# Altium PCB NewSpeedRadar_Board.PcbDoc (part 1 of 4)
Units mm, origin at the board's own origin, x right, y up, seen from the top; angles counter-clockwise.
Board outline 150 x 110 mm, 2 copper layers (Top Layer, Bottom Layer), stack 1.571 mm thick; 208 components, 164 nets, 788 pads, 782 vias.
Unrouted connection lines stored in the file: 231.
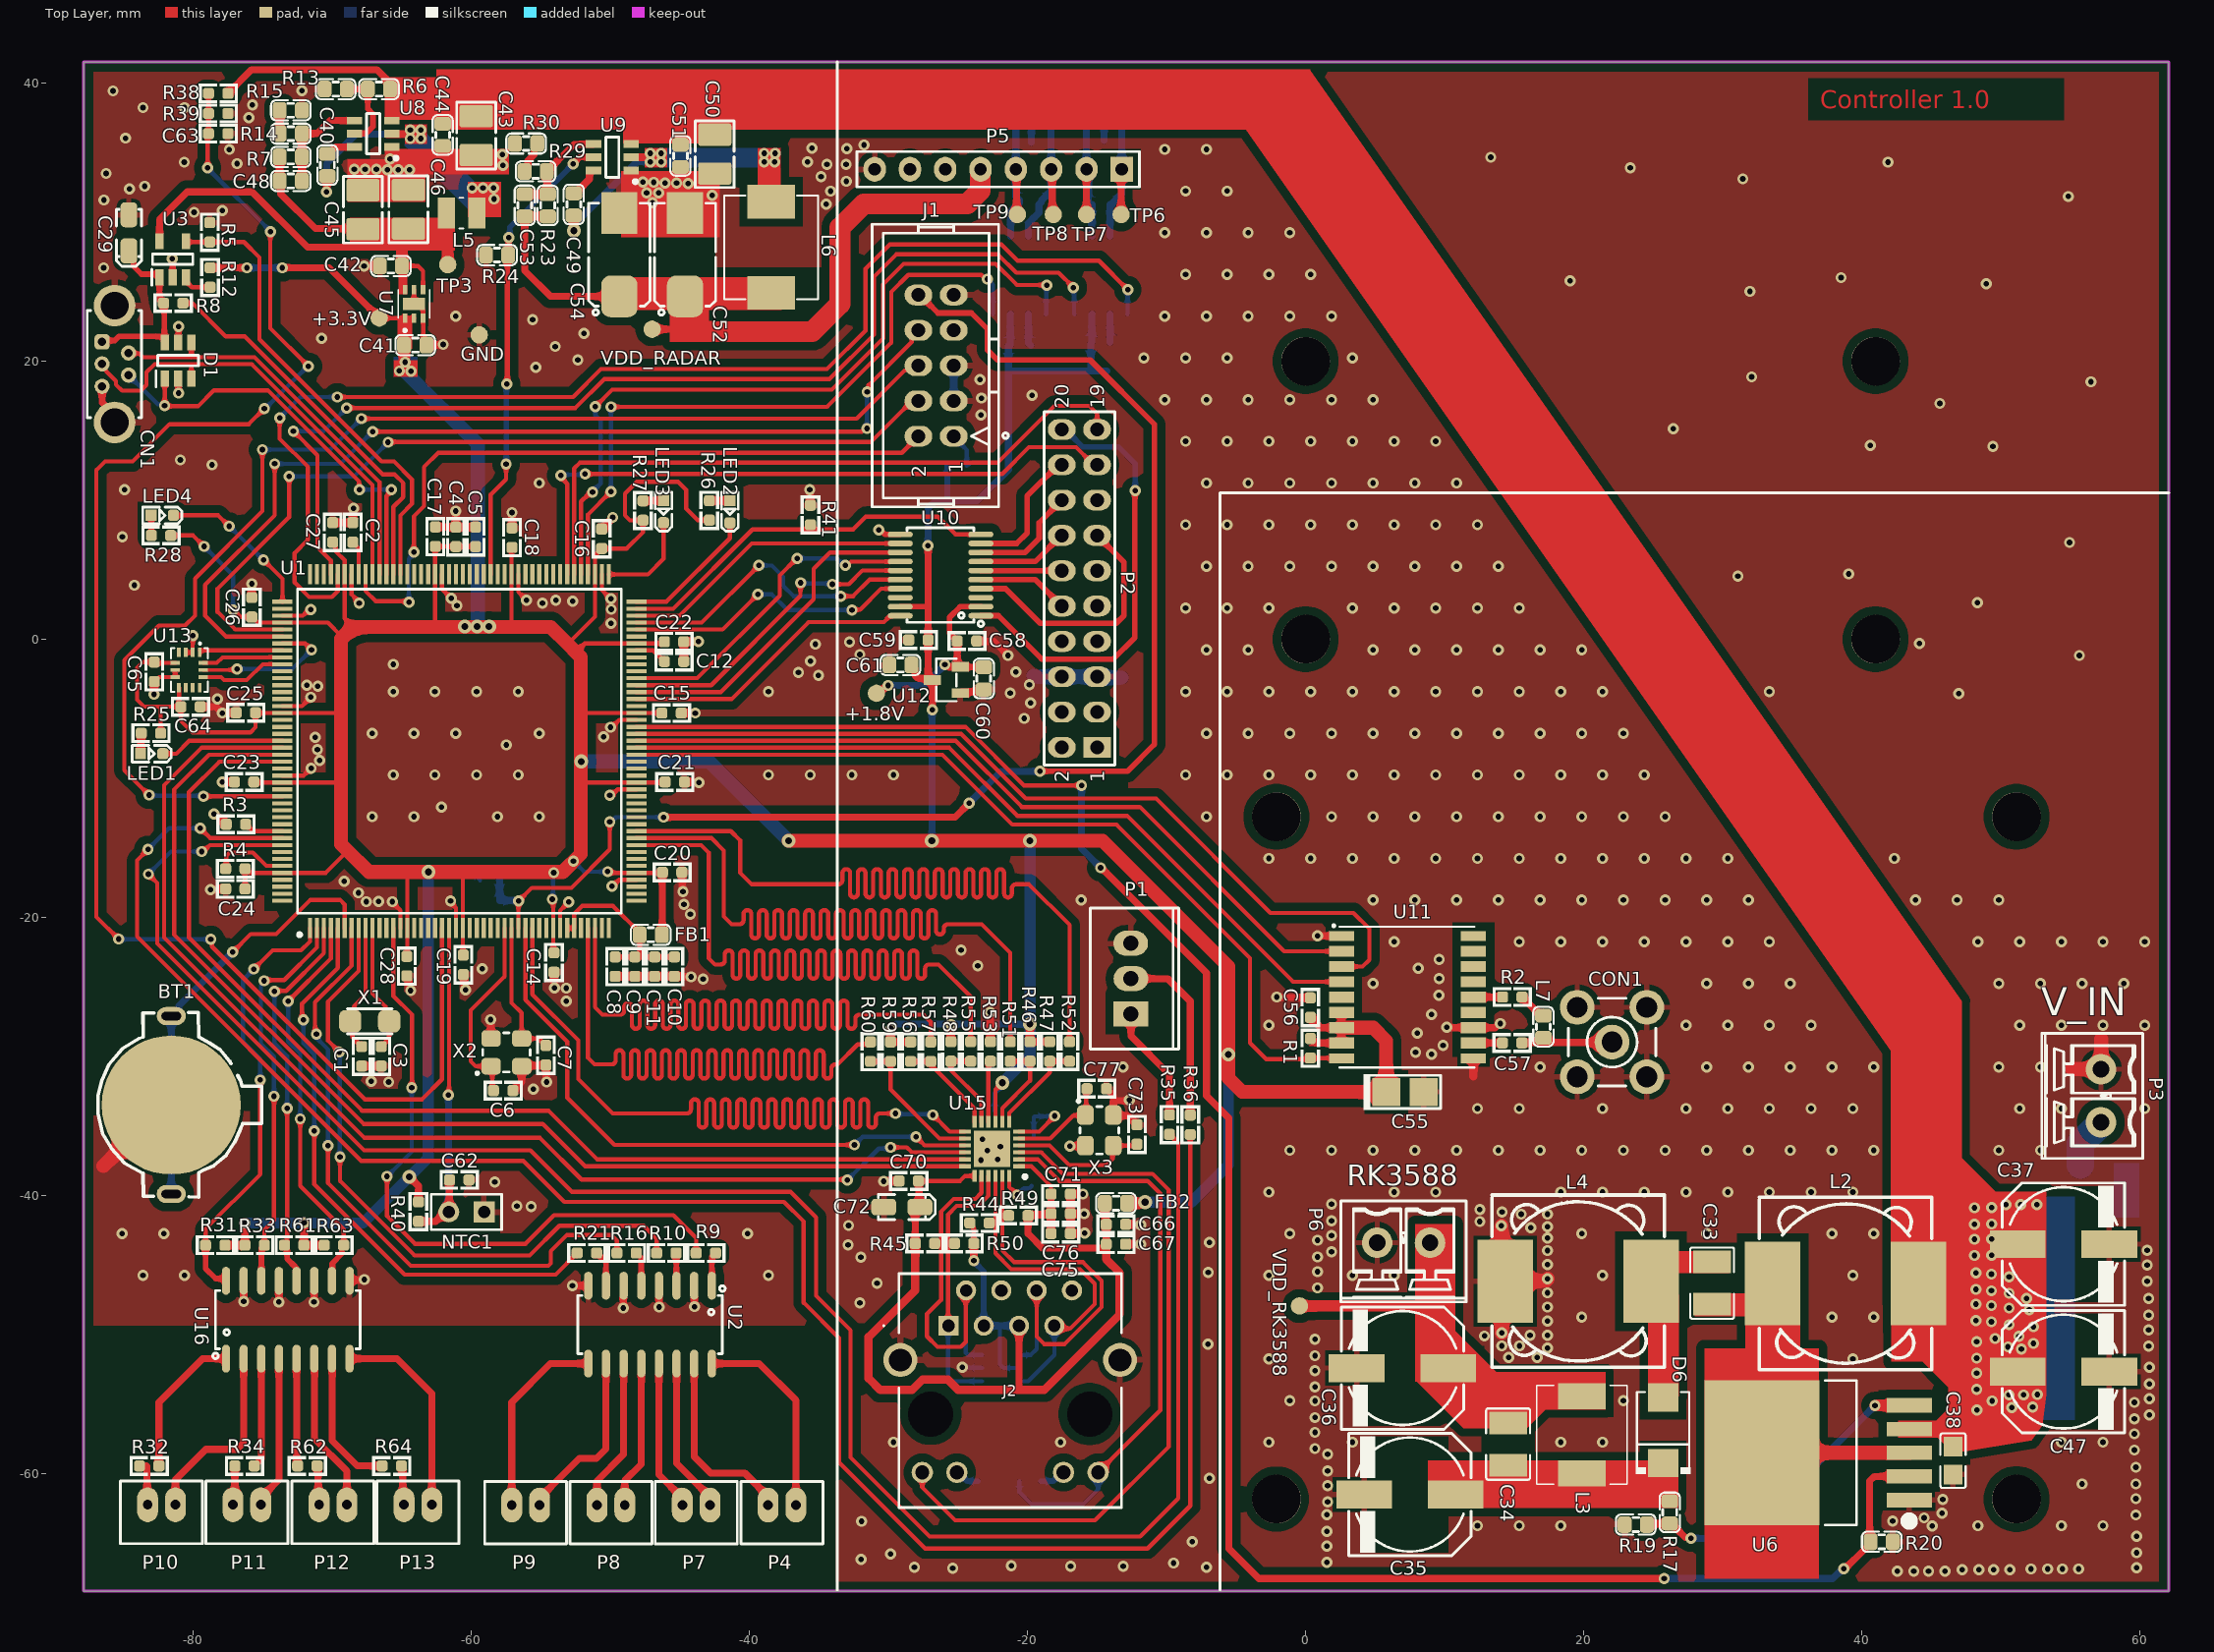
[diagram p0: Top Layer view]
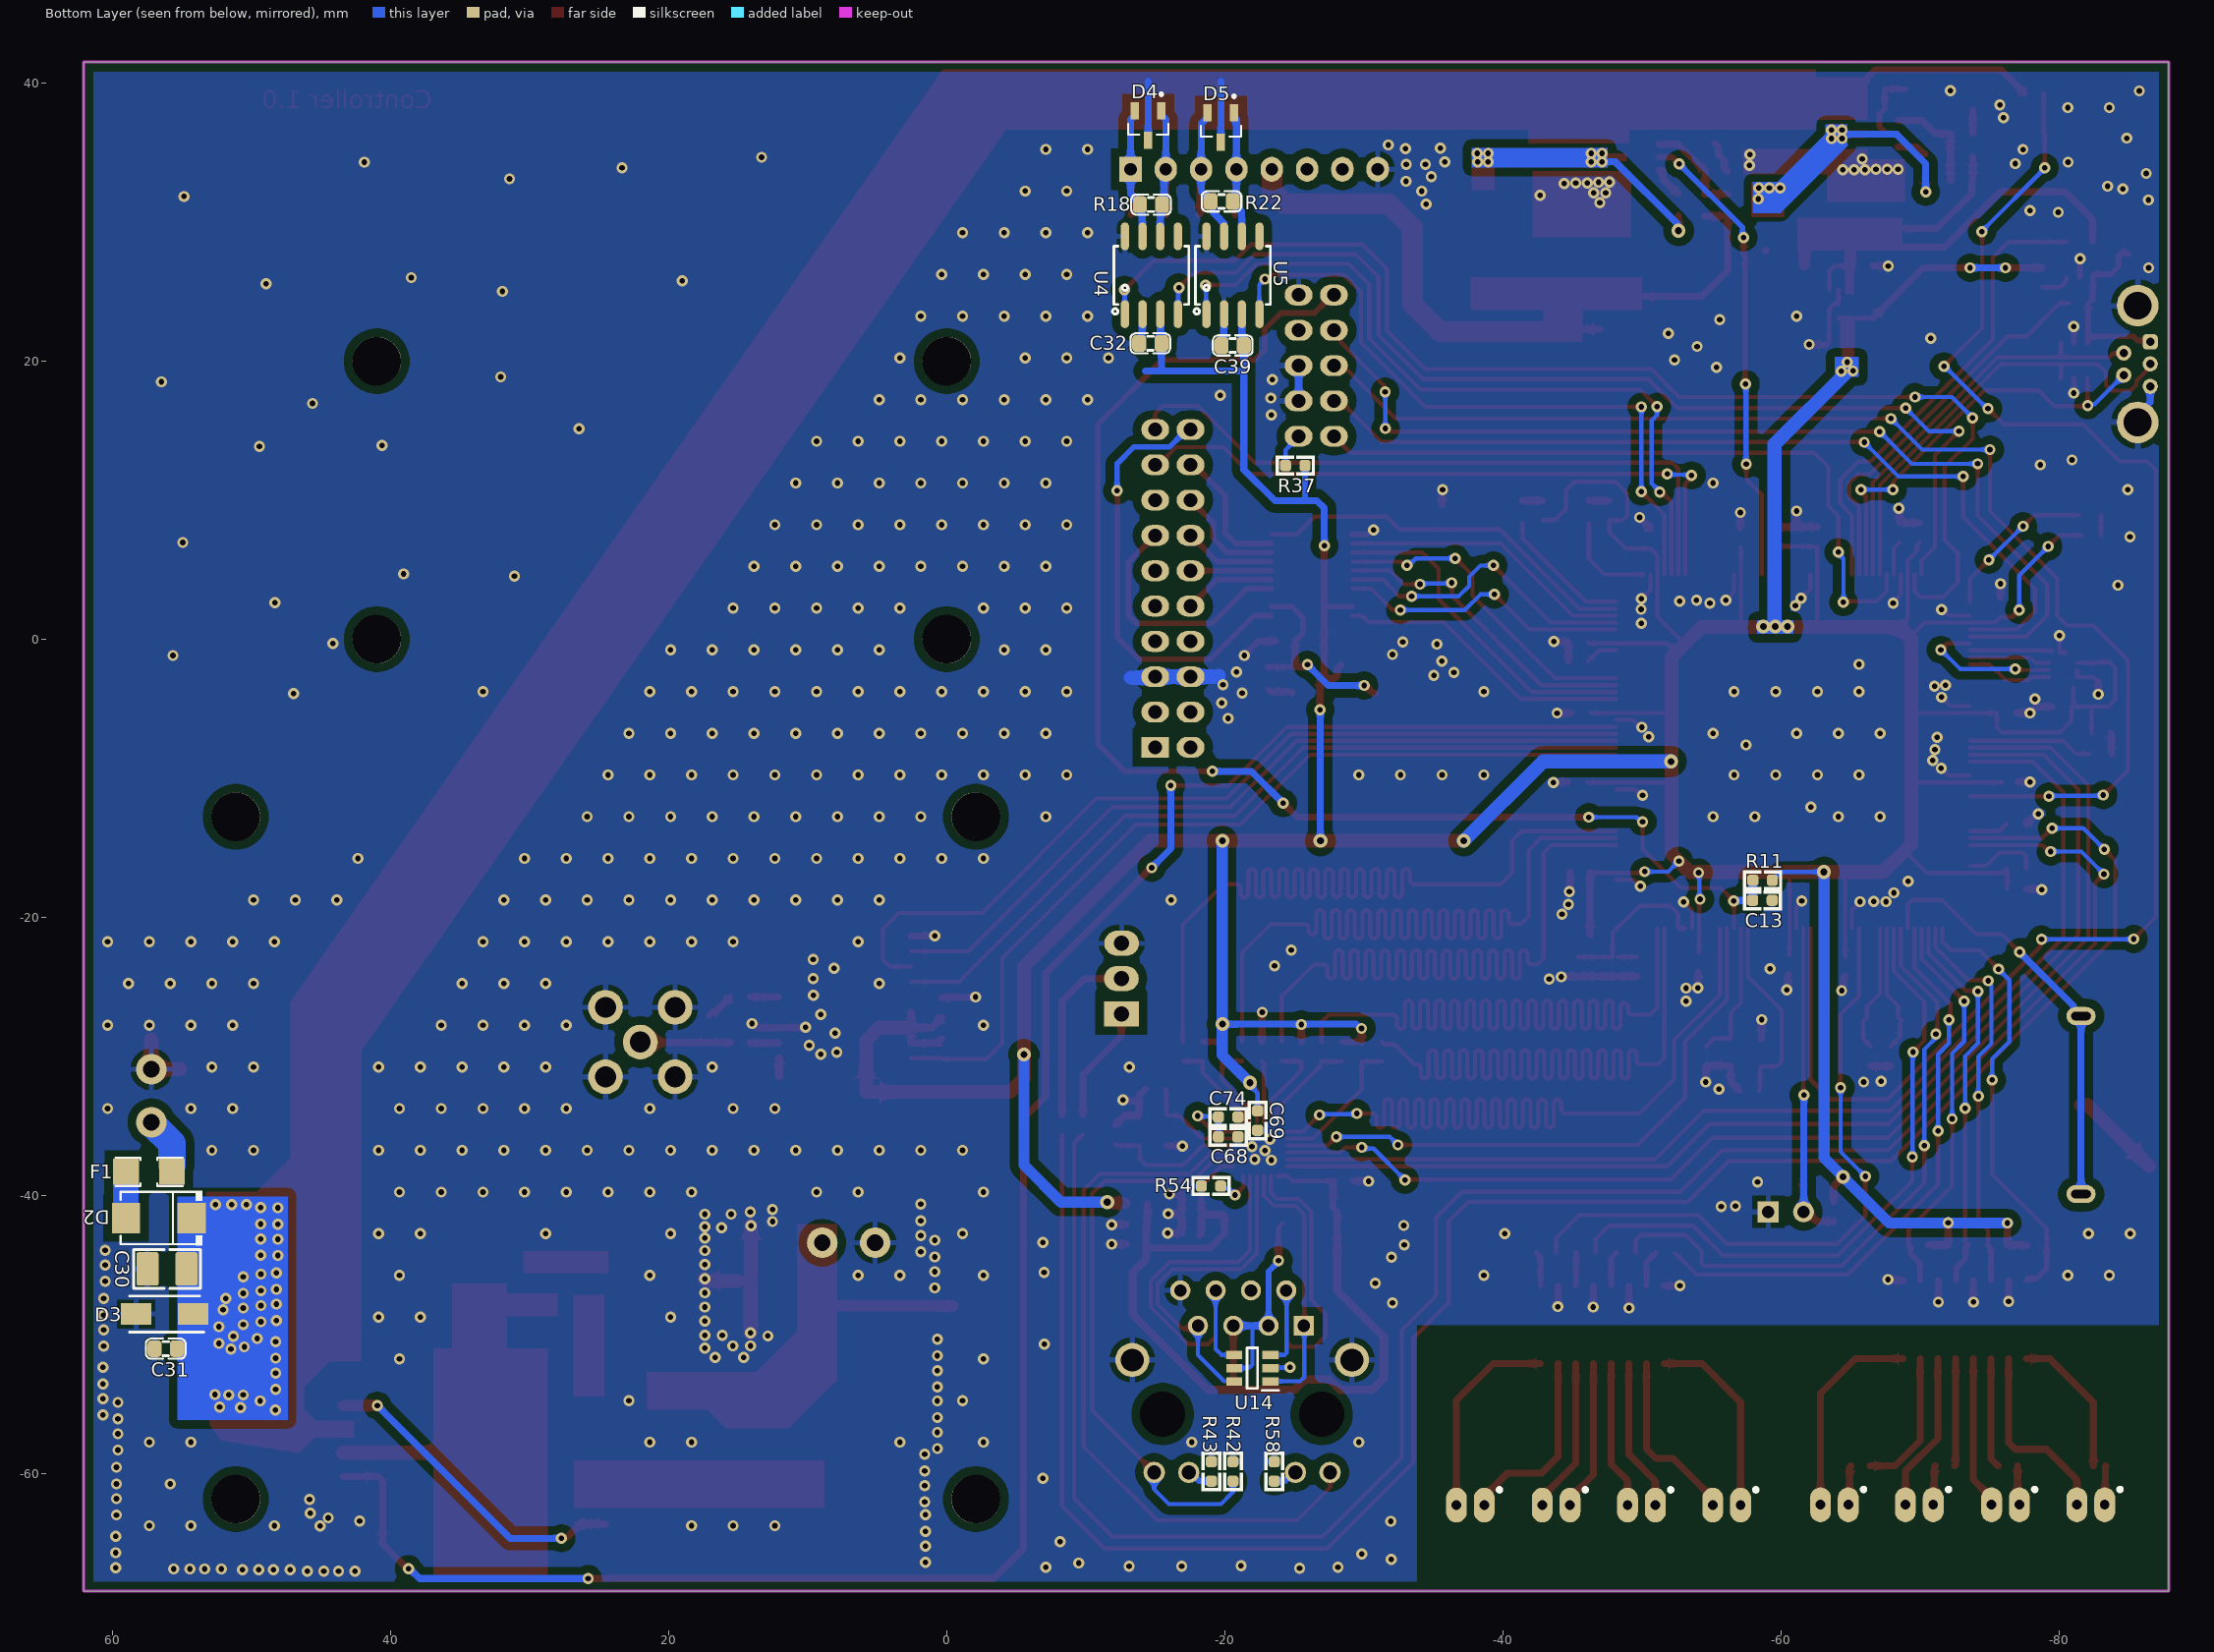
[diagram p1: Bottom Layer view, seen from below]
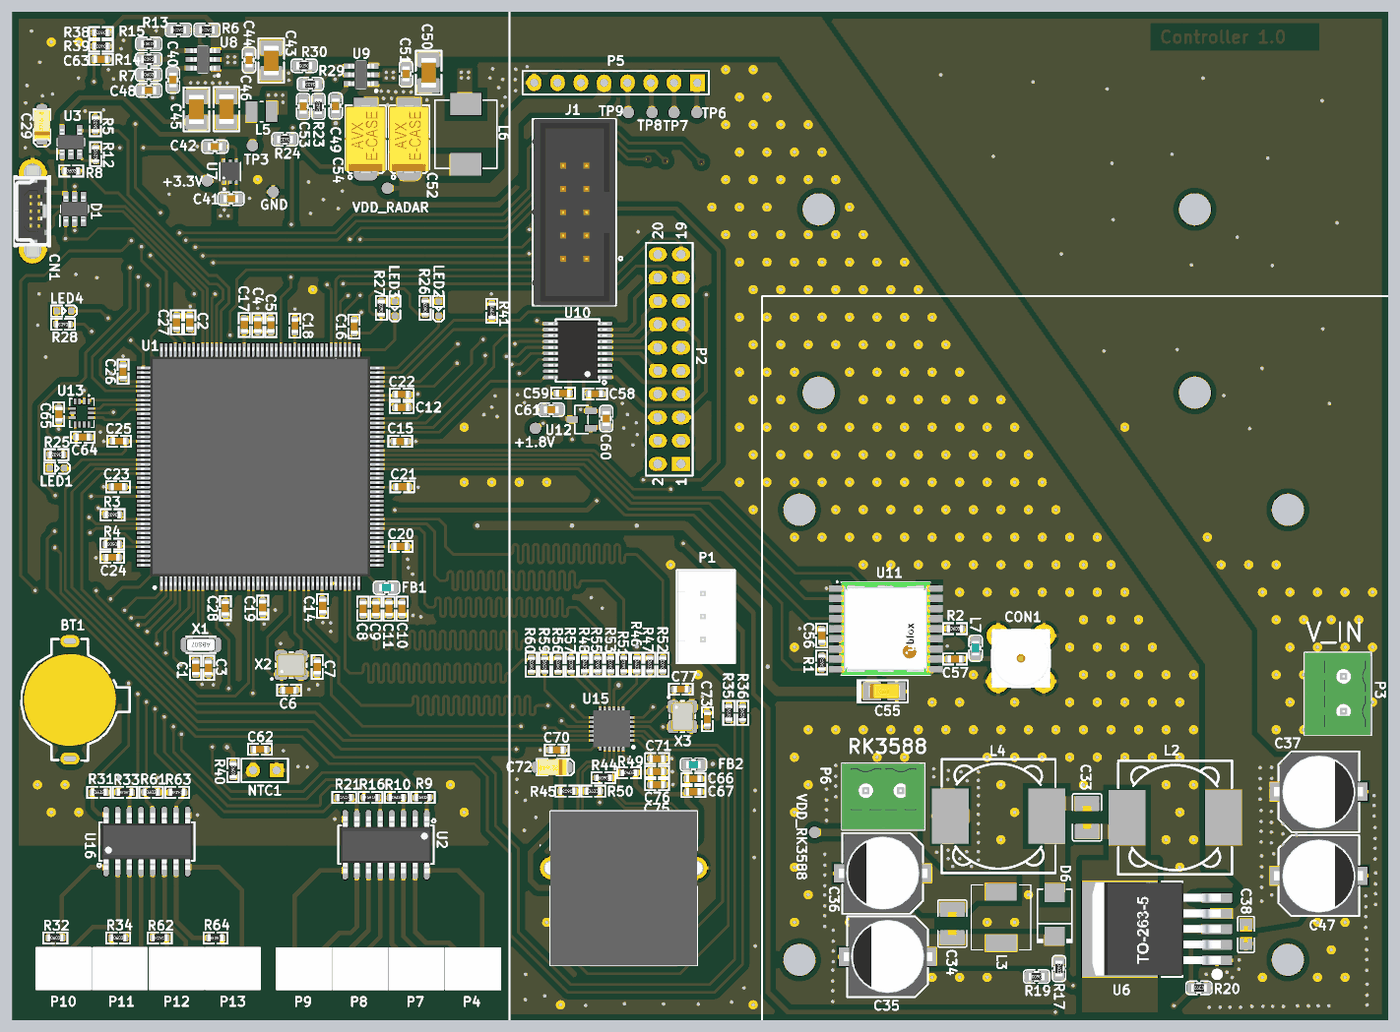
[diagram p4: 3D render of the assembled board from above, using the file's embedded part models]
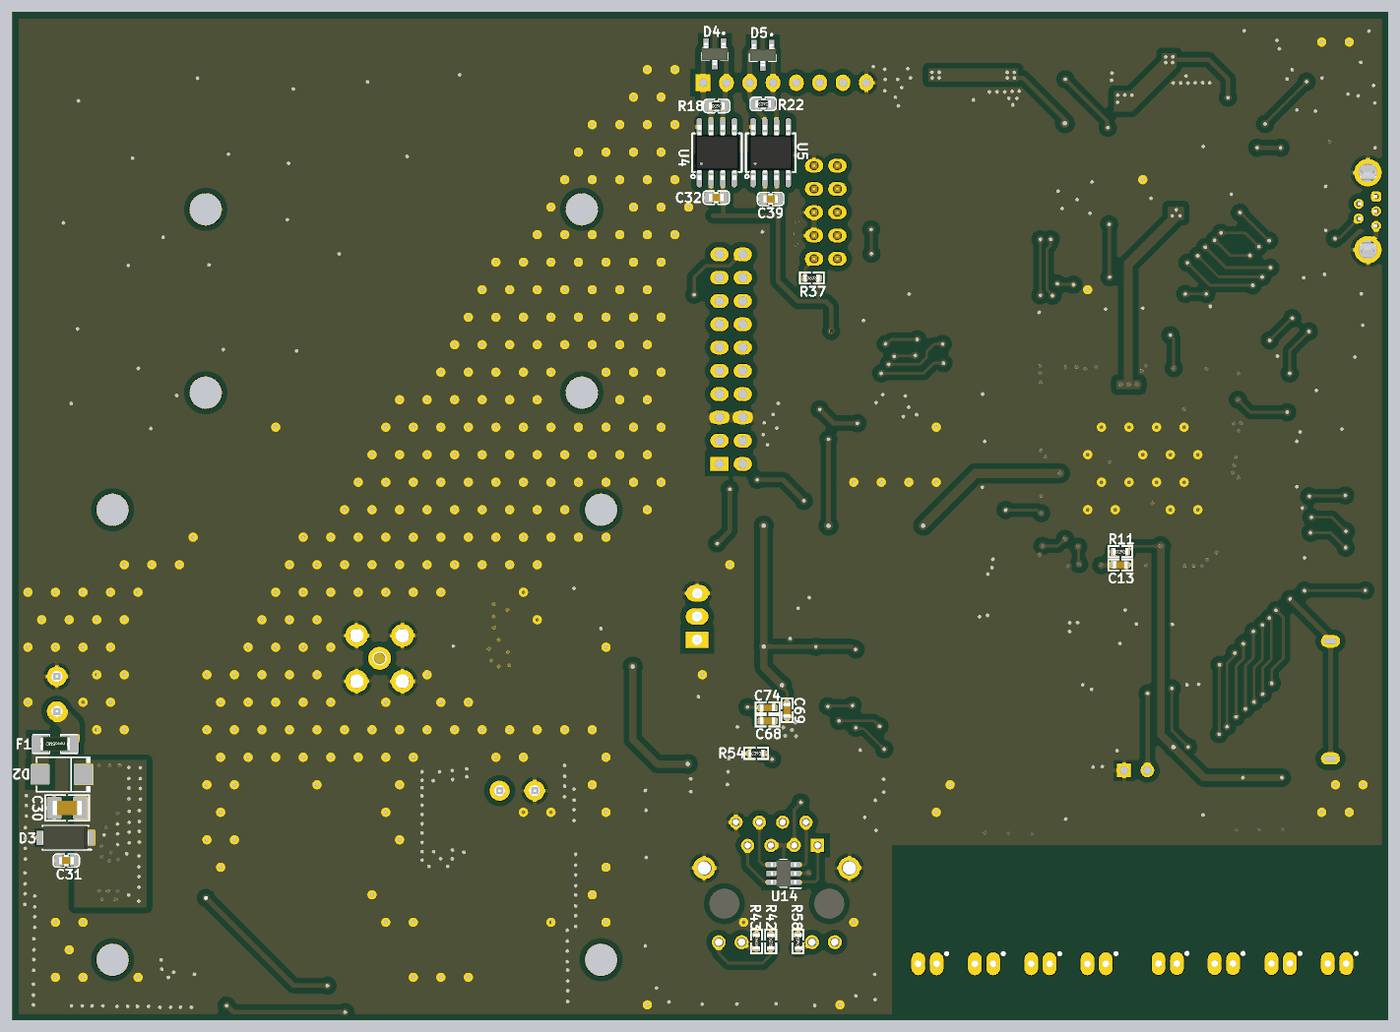
[diagram p5: 3D render of the assembled board from below, using the file's embedded part models]

## Layer stack, top to bottom
Top Solder: solder mask 0.0102, Solder Resist, Dk 3.5
Top Layer: signal copper 0.0356
Dielectric 1: dielectric 1.5, FR-4, Dk 4.8
Bottom Layer: signal copper 0.0356
Bottom Solder: solder mask 0.0102, Solder Resist, Dk 3.5

## Board outline
-87.906,-68.475 -87.906,41.525 62.094,41.525 62.094,-68.475

## Design rules (kind name [scope] priority, off if disabled: settings)
AcuteAngle [All] p1 off: minimum=4.00000000000000E+0001 checktracksonly=TRUE
BoardOutlineClearance [All] p1: gap=0.2 ignorepadtopadclearanceinfootprint=FALSE
Clearance Poly_Clearance [All vs InPolygon] p1: gap=0.6 ignorepadtopadclearanceinfootprint=TRUE
Clearance [All] p2: gap=0.2 ignorepadtopadclearanceinfootprint=TRUE
DiffPairsRouting [IsDifferentialPair] p1: maxlimit=0.2 minlimit=0.2 mostfreqgap=0.2 toplayer_minwidth=0.3 toplayer_maxwidth=0.3 toplayer_prefwidth=0.3 bottomlayer_minwidth=0.3 bottomlayer_maxwidth=0.3 bottomlayer_prefwidth=0.3 impedanceprofiledriven=TRUE impedanceprofileid={2EFD21D1-4BE4-4069-921C-6C90A30C849C} impedanceprofilevalue=100.000000 maxuncoupledlength=12.7
HoleSize [All] p1: absolutevalues=TRUE maxlimit=10 minlimit=0.4 maxpercent=80.000 minpercent=20.000
HoleToHoleClearance [All] p1: gap=0.3 allowstackedmicrovias=TRUE
MatchedLengths [InNetClass('ETHERNET')] p1: tolerance=10 checknetsindiffpair=FALSE checkdiffpairvsdiffpair=TRUE checkxsignals=TRUE checkothers=TRUE
MatchedLengths "Schematic Matched Net Lengths_3" [InNet('TD_N')] p2: tolerance=2.54 checknetsindiffpair=TRUE checkdiffpairvsdiffpair=FALSE checkxsignals=FALSE checkothers=FALSE
MatchedLengths "Schematic Matched Net Lengths_2" [InNet('RD_N')] p3: tolerance=2.54 checknetsindiffpair=TRUE checkdiffpairvsdiffpair=FALSE checkxsignals=FALSE checkothers=FALSE
MatchedLengths "Schematic Matched Net Lengths_1" [InNet('TD_P')] p4: tolerance=2.54 checknetsindiffpair=TRUE checkdiffpairvsdiffpair=FALSE checkxsignals=FALSE checkothers=FALSE
MatchedLengths "Schematic Matched Net Lengths" [InNet('RD_P')] p5: tolerance=2.54 checknetsindiffpair=TRUE checkdiffpairvsdiffpair=FALSE checkxsignals=FALSE checkothers=FALSE
MinimumAnnularRing [All] p1: minimumring=0.15
MinimumSolderMaskSliver [All] p1: minsoldermaskwidth=0.01
PolygonConnect [All] p1: thpad.connectstyle=Relief thpad.reliefconductorwidth=0.4 thpad.reliefentries=4 thpad.polygonreliefangle="90 Angle" thpad.airgapwidth=0.4 smdpad.connectstyle=Relief smdpad.reliefconductorwidth=0.4 smdpad.reliefentries=4 smdpad.polygonreliefangle="90 Angle" smdpad.airgapwidth=0.254 via.connectstyle=Direct via.reliefconductorwidth=0.4 via.reliefentries=4 via.polygonreliefangle="90 Angle" via.airgapwidth=0.254
RoutingVias [All] p1: holewidth=0.4 width=0.7 viastyle="Through Hole" minholewidth=0.4 minwidth=0.7 maxholewidth=3 maxwidth=6
SilkToSolderMaskClearance [IsPad] p1 off: minsilkscreentomaskgap=0.01 clearancetoexposedcopper=TRUE
SolderMaskExpansion [All] p1: expansion=0.102 istentingtop=FALSE
Width [All] p1: maxlimit=2 minlimit=0.28 preferedwidth=0.5
25 further rules are at their usual default settings.

## Classes and differential pairs
net class ETHERNET: ETH_MDC ETH_MDIO RMII_CRS_DV RMII_REF_CLK RMII_RXD0 RMII_RXD1 RMII_TXD0 RMII_TXD1
component class Ethernet: C66 C67 C68 C69 C70 C71 C72 C73 C74 C75 C76 C77 FB2 J2 R42 R43 R44 R45 R46 R47 R48 R49 R50 R51 R52 R53 R54 R55 R56 R57 R58 R59 R60 U14 U15 X3
component class USB_OTG_FS: C29 CN1 D1 R5 R12 U3
component class STM32H743IIT6: BT1 C1 C2 C3 C4 C5 C6 C7 C8 C9 C10 C11 C12 C13 C14 C15 C16 C17 C18 C19 C20 C21 C22 C23 C24 C25 C26 C27 C28 C55 C56 C57 C58 C59 C62 C64 C65 CON1 FB1 GND J1 L7 LED1 LED2 LED3 LED4 NTC1 P1 P2 P4 P7 P8 P9 P10 P11 P12 P13 R1 R2 R3 R4 R8 R9 R10 R11 R16 R21 R25 R26 R27 R28 R31 R32 R33 R34 R35 R36 R37 R40 R41 R61 R62 R63 R64 U1 U2 U10 U11 U13 U16 X1 X2
component class Power_CAN_IO_GPS: +1.8V +3.3V C30 C31 C32 C33 C34 C35 C36 C37 C38 C39 C40 C41 C42 C43 C44 C45 C46 C47 C48 C49 C50 C51 C52 C53 C54 C60 C61 C63 D2 D3 D4 D5 D6 F1 L2 L3 L4 L5 L6 P3 P5 P6 R6 R7 R13 R14 R15 R17 R18 R19 R20 R22 R23 R24 R29 R30 R38 R39 TP3 TP6 TP7 TP8 TP9 U4 U5 U6 U7 U8 U9 U12 VDD_RADAR VDD_RK3588
differential pair TD: +TD_P -TD_N
differential pair RD: +RD_P -RD_N
differential pair USB_FS1_D: +USB_FS1_D_P -USB_FS1_D_N

## Components (designator, comment, footprint, x,y, rotation, side; value= is the part's Value field where it differs from the comment)
+1.8V "TEST POINT" TEST_POINT -30.874,-3.889 r0 top
+3.3V "TEST POINT" TEST_POINT -66.637,23.111 r90 top
BT1 "MY-1220-06X" BAT-TH_MY-1220-01 -81.598,-33.505 r90 top value=BAT3volt
C1 "1.5pF" C0603 -67.907,-30 r270 top value=100nF
C2 "2.2uF" C0603 -68.542,7.682 r90 top value=10nF
C3 "1.5pF" C0603 -66.485,-30 r270 top value=100nF
C4 "1uF" C0603 -61.126,7.363 r270 top value=10nF
C5 "100nF" C0603 -59.703,7.363 r270 top value=10nF
C6 "3.9pF" C0603 -57.722,-32.464 r0 top
C7 "3.9pF" C0603 -54.649,-29.924 r270 top
C8 "1uF" C0603 -49.67,-23.548 r90 top value=10nF
C9 "100nF" C0603 -48.248,-23.548 r90 top value=10nF
C10 "1uF" C0603 -45.403,-23.548 r90 top value=10nF
C11 "100nF" C0603 -46.825,-23.548 r90 top value=10nF
C12 "2.2uF" C0603 -45.428,-1.603 r180 top value=10nF
C13 "100nF" C0603 -58.679,-18.78 r0 bottom value=100pF
C14 "100nF" C0603 -54.064,-23.255 r270 top
C15 "100nF" C0603 -45.606,-5.311 r0 top
C16 "100nF" C0603 -50.635,7.225 r90 top
C17 "100nF" C0603 -62.599,7.378 r90 top
C18 "100nF" C0603 -57.087,7.301 r90 top
C19 "100nF" C0603 -60.592,-23.421 r270 top
C20 "100nF" C0603 -45.567,-16.767 r0 top
C21 "100nF" C0603 -45.378,-10.264 r0 top
C22 "100nF" C0603 -45.428,-0.18 r0 top
C23 "100nF" C0603 -76.354,-10.264 r180 top
C24 "100nF" C0603 -76.989,-17.96 r180 top
C25 "100nF" C0603 -76.239,-5.286 r180 top
C26 "100nF" C0603 -75.807,2.298 r90 top
C27 "100nF" C0603 -69.99,7.682 r90 top
C28 "100nF" C0603 -64.656,-23.512 r270 top
C29 "10uF/10V TAN A" C_TN_3216 -84.648,29.233 r90 top value=10uF
C30 "22uF" C1206E 56.094,-45.291 r180 bottom
C31 "10nF/50V" C0603E 56.183,-51.031 r180 bottom
C32 "100nF" C0603E -14.644,21.283 r180 bottom
C33 "1uF/100V" C1210 29.248,-46.313 r90 top
C34 "47uF" C1210 14.566,-57.896 r90 top
C35 "220uF/35V" C_EL_D8L10 7.505,-61.521 r180 top value=220uF
C36 "220uF/35V" C_EL_D8L10 6.972,-52.428 r180 top value=220uF
C37 "220uF/25V" C_EL_D8L10 54.521,-43.513 r0 top value=220uF
C38 "100nF/50V" C0805 46.575,-59.086 r90 top
C39 "100nF" C0603E -20.575,21.13 r180 bottom
C40 "100nF" C0603E -70.371,34.11 r270 top
C41 "10uF" C0603E -64.047,21.156 r180 top
C42 "10uF" C0603E -65.799,26.845 r0 top
C43 "22uF" C1206E -59.662,36.23 r90 top
C44 "100nF" C0603E -62.075,36.281 r90 top
C45 "22uF/16V" C1206E -67.815,30.899 r270 top
C46 "22uF/16V" C1206E -64.539,30.925 r270 top
C47 "220uF/25V" C_EL_D8L10 54.519,-52.682 r0 top value=220uF
C48 "75pF" C0603E -73,32.967 r180 top
C49 "100nF" C0603E -52.642,31.278 r270 top
C50 "22uF" C1206E -42.507,34.897 r90 top
C51 "100nF" C0603E -44.971,34.77 r90 top
C52 "47uF/25V TAN D" C_TN_7343 -44.641,27.661 r90 top value=-uF
C53 "75pF" C0603E -56.173,31.214 r270 top
C54 "47uF/25V TAN D" C_TN_7343 -49.365,27.661 r90 top value=-uF
C55 "10uF/6.3V TAN A" TANTALUM-A 5.802,-32.567 r180 top
C56 "100nF" C0603 0.341,-26.496 r90 top
C57 "47PF" C0603 14.858,-29.036 r180 top
C58 "100nF" C0603 -24.361,-0.13 r0 top
C59 "100nF" C0603 -27.852,-0.053 r180 top
C60 "1uF" C0603E -23.153,-2.822 r90 top
C61 "1uF" C0603E -29.147,-1.857 r0 top
C62 "100nF" C0603 -60.883,-38.89 r180 top value=100pF
C63 "100nF" C0603 -78.22,36.37 r180 top value=100pF
C64 "100nF" C0603 -80.212,-4.854 r180 top value=10nF
C65 "100nF" C0603 -82.817,-2.339 r90 top value=10nF
C66 "100nF" C0603 -13.64,-42.09 r180 top
C67 "100nF" C0603 -13.64,-43.513 r180 top
C68 "470pF" C0603 -20.246,-35.791 r0 bottom value=100nF
C69 "100nF" C0603 -22.365,-34.623 r90 bottom
C70 "100nF" C0603 -28.549,-38.966 r0 top
C71 "100nF" C0603 -17.615,-39.906 r180 top
C72 "10uF/10V TAN A" C_TN_3216 -29.045,-40.846 r180 top value=10uF
C73 "30pF" C0603 -12.129,-35.625 r90 top value=100nF
C74 "1uF" C0603 -20.246,-34.369 r180 bottom value=1µF
C75 "100nF" C0603 -17.615,-42.751 r180 top
C76 "100nF" C0603 -17.615,-41.328 r180 top
C77 "30pF" C0603 -15.025,-32.337 r0 top value=100nF
CN1 "651005136421" 651005136421 -85.7,19.797 r270 top
CON1 "63012002124503" SMA 22.043,-28.948 r270 top
D1 "ESDA6V1BC6" SOT95P280X145-6N -81.1,20.043 r90 top
D2 "SS56B" SMB_L4.6-W3.6-LS5.3-RD 56.678,-41.633 r0 bottom
D3 "SMAJ15A" DIOM5026X229N 56.272,-48.542 r0 bottom
D4 "NUP2105LT1G" SOT95P237X111-3N -14.491,36.948 r270 bottom
D5 "NUP2105LT1G" SOT95P237X111-3N -19.724,36.802 r270 bottom
D6 "SS56B" SMB_L4.6-W3.6-LS5.3-RD 25.717,-56.9 r90 top
F1 "JFC1206 1300FS 63V 3A" "1206 FUSE" 57.389,-38.306 r0 bottom
FB1 "BLM18KG221SN1D" L0603E -47.105,-21.262 r180 top value=100uH
FB2 "BLM18KG221SN1D" L0603E -13.64,-40.566 r0 top value=100uH
GND "TEST POINT" TEST_POINT -59.449,21.892 r90 top
J1 "DS1013-10S" IDC_2X5 -26.582,19.682 r90 top value=IDC_2X5
J2 "hr915310a" hr915310a -25.695,-49.381 r180 top
L2 "SLF12565T-330M2R8-PF" IND-SMD_L12.3-W12.3 38.849,-46.332 r180 top
L3 "SPM6530T-2R2M" IND_SPM6530T-2R2M-HZ 19.875,-57.229 r90 top
L4 "SLF12565T-330M2R8-PF" IND-SMD_L12.3-W12.3 19.603,-46.18 r180 top
L5 "DFE252012F-100M=P2" INDC2520X120N -60.719,30.655 r180 top
L6 "TMPC0603H-100MG-D" IND-SMD_L7.3-W6.6 -38.443,28.19 r90 top
L7 "10nH (LQW18AN10NG00)" L0603E 17.105,-27.868 r270 top
LED1 "LED603BLU" LED0603BLU -83.008,-8.232 r0 top
LED2 "LED603GRN" LED0603GRN -41.415,9.167 r270 top
LED3 "LED603RED" LED0603RED -46.19,9.181 r270 top
LED4 "LED603YLW" LED0603YLW -82.246,8.913 r0 top
NTC1 "PT103J2" HDR1X2 -59.094,-41.195 r180 top
P1 "2.54mm-3P ZZ-MS" xh-3 -12.563,-26.952 r90 top
P2 "BH-2.54-20GF-K" HDR2X10 -14.999,-7.775 r90 top
P3 "KF2EDGV+K-3.81-2P" PHOENIX_1803426 57.211,-32.845 r90 top
P4 "JST PH 2mm 2P RIGHT" "JST B2B-PH-K" -37.665,-62.283 r0 top
P5 "XH-8" HDR1X8 -13.221,33.805 r180 top
P6 "KF2EDGV+K-3.81-2P" PHOENIX_1803426 7.048,-43.411 r180 top
P7 "JST PH 2mm 2P RIGHT" "JST B2B-PH-K" -43.838,-62.283 r0 top
P8 "JST PH 2mm 2P RIGHT" "JST B2B-PH-K" -49.975,-62.283 r0 top
P9 "JST PH 2mm 2P RIGHT" "JST B2B-PH-K" -56.106,-62.283 r0 top
P10 "JST PH 2mm 2P RIGHT" "JST B2B-PH-K" -82.3,-62.258 r0 top
P11 "JST PH 2mm 2P RIGHT" "JST B2B-PH-K" -76.162,-62.258 r0 top
P12 "JST PH 2mm 2P RIGHT" "JST B2B-PH-K" -69.965,-62.258 r0 top
P13 "JST PH 2mm 2P RIGHT" "JST B2B-PH-K" -63.854,-62.258 r0 top
R1 "10K" R0603 0.341,-29.417 r90 top
R2 "10" R0603 14.87,-25.734 r0 top
R3 "10K" R0603 -76.95,-13.312 r180 top value=1K
R4 "10K" R0603 -76.989,-16.513 r180 top value=1K
R5 "10K" R0603 -78.829,29.272 r90 top value=1K
R6 "73.2K" R0603E -66.663,39.571 r180 top
R7 "100K/1%" R0603E -73,34.694 r0 top
R8 "10K" R0603 -81.457,24.178 r0 top value=1K
R9 "220" R0603 -43.142,-44.148 r0 top value=1K
R10 "220" R0603 -45.987,-44.148 r0 top value=1K
R11 "10K" R0603 -58.69,-17.332 r0 bottom value=1K
R12 "47K" R0603 -78.804,26.021 r270 top value=1K
R13 "10K" R0603E -69.774,39.571 r180 top
R14 "10K/1%" R0603E -73,36.37 r180 top
R15 "3.3K/1%" R0603E -73,38.047 r0 top
R16 "220" R0603 -48.846,-44.148 r0 top value=1K
R17 "24K/1%" R0603E 26.2,-62.804 r270 top value=100K
R18 "120" R0603E -14.694,31.265 r0 bottom
R19 "2.74K/1%" R0603E 23.749,-63.68 r180 top value=100K
R20 "10K" R0603E 41.444,-64.919 r0 top
R21 "220" R0603 -51.702,-44.148 r0 top value=1K
R22 "120" R0603E -19.774,31.493 r0 bottom
R23 "100K/1%" R0603E -54.522,31.214 r90 top
R24 "10K" R0603E -58.166,27.633 r180 top
R25 "220" R0603 -83.06,-6.759 r180 top value=1K
R26 "220" R0603 -42.888,9.267 r90 top value=1K
R27 "220" R0603 -47.664,9.257 r90 top value=1K
R28 "220" R0603 -82.335,7.465 r180 top value=1K
R29 "6.8K/1%" R0603E -55.385,33.652 r180 top
R30 "330/1%" R0603E -56.071,35.659 r180 top
R31 "4.7K" R0603 -78.434,-43.589 r0 top value=1K
R32 "220" R0603 -83.187,-59.464 r0 top value=1K
R33 "4.7K" R0603 -75.604,-43.589 r180 top value=1K
R34 "220" R0603 -76.326,-59.464 r0 top value=1K
R35 "22" R0603 -9.792,-34.916 r270 top value=1K
R36 "22" R0603 -8.294,-34.928 r270 top value=1K
R37 "NA" R0603 -25.07,12.496 r180 bottom value=1K
R38 "100K" R0603 -78.22,39.266 r180 top
R39 "10K" R0603 -78.22,37.818 r180 top
R40 "4.7K" R0603 -63.818,-41.176 r270 top value=1K
R41 "10K" R0603 -35.624,8.938 r270 top
R42 "10K" R0603 -20.587,-59.859 r270 bottom
R43 "270" R0603 -19.038,-59.859 r270 bottom value=10K
R44 "50" R0603 -23.457,-41.989 r180 top
R45 "50" R0603 -27.383,-43.462 r180 top
R46 "10K" R0603 -19.825,-29.656 r270 top
R47 "10K" R0603 -18.403,-29.656 r270 top
R48 "10K" R0603 -25.515,-29.656 r270 top
R49 "50" R0603 -20.663,-41.455 r0 top
R50 "50" R0603 -24.564,-43.462 r0 top
R51 "33" R0603 -21.248,-29.656 r90 top
R52 "33" R0603 -16.98,-29.656 r90 top
R53 "10K" R0603 -22.67,-29.656 r90 top
R54 "12K1" R0603 -19.015,-39.333 r0 bottom
R55 "33" R0603 -24.092,-29.656 r90 top
R56 "1K5" R0603 -28.41,-29.67 r90 top
R57 "0" R0603 -26.963,-29.67 r90 top value=1K
R58 "270" R0603 -23.559,-59.859 r90 bottom value=10K
R59 "10K" R0603 -29.858,-29.67 r270 top
R60 "33" R0603 -31.306,-29.67 r90 top
R61 "4.7K" R0603 -72.759,-43.589 r0 top value=1K
R62 "220" R0603 -71.808,-59.464 r180 top value=1K
R63 "4.7K" R0603 -69.9,-43.589 r180 top value=1K
R64 "220" R0603 -65.737,-59.464 r180 top value=1K
TP3 "TEST POINT" TEST_POINT -61.71,26.947 r90 top
TP6 "TEST POINT" TEST_POINT -13.272,30.554 r90 top
TP7 "TEST POINT" TEST_POINT -15.761,30.554 r90 top
TP8 "TEST POINT" TEST_POINT -18.149,30.554 r90 top
TP9 "TEST POINT" TEST_POINT -20.74,30.554 r90 top
U1 "STM32H743IIT6" QFP50P2600X2600X160-176N -60.872,-8.054 r90 top locked
U2 "TLP281-4" SO_16 -47.156,-49.304 r270 top
U3 "STMPS2151STR" SOT95P280X145-5N -81.496,27.332 r90 top
U4 "SN65HVD230" SO_8 -14.72,26.182 r90 bottom
U5 "SN65HVD230" SO_8 -20.587,26.182 r90 bottom
U6 "XL6009" TO-263-5 43.425,-61.918 r90 top
U7 "TLV76733DRVR" SON65P200X200X80-7N -64.138,24.118 r90 top
U8 "TPS54202DDC" SOT95P280X100-6N -67.079,36.357 r180 top
U9 "TPS54202DDC" SOT95P280X100-6N -49.873,34.668 r180 top
U10 "TXS0108E" SOG65_20 -26.262,4.613 r180 top
U11 "MAX-7Q" MAX 2.576,-21.344 r180 top
U12 "AP2120N-1.8TRG1" SOT-23-3_L2.9-W1.3-P1.90-LS2.4-BR -25.845,-2.924 r0 top
U13 "LSM6DSO" LGA-14_L3.0-W2.5-P0.50-TL -80.303,-2.212 r270 top
U14 "USBLC6-4SC6" SOT95P280X145-6N -21.984,-52.428 r0 bottom
U15 "LAN8742A-CZ-TR" QFN50P400X400X100-25N-D -22.564,-36.661 r180 top
U16 "TLP281-4" SO_16 -73.216,-48.948 r90 top
VDD_RADAR "TEST POINT" TEST_POINT -47.003,22.299 r90 top
VDD_RK3588 "TEST POINT" TEST_POINT -0.445,-47.958 r90 top
X1 "ABS07-32.768KHZ-T" XTL_2_3215 -67.323,-27.485 r180 top value=XTL_32.768KHz
X2 "XTL_25MHz 32x25" XTL_4_3225 -57.493,-29.721 r90 top
X3 "XTL_25MHz 32x25" XTL_4_3225 -14.837,-35.326 r0 top value="25MHz 32x25"

## Footprints (in the part's own frame and the unit in brackets; to place one, negate y for a bottom-side part, rotate by r counter-clockwise, add the part's x,y. Pads: shape width x height; smd on the part's side, far side on the other; paste and mask are expansions set on the pad)
"1206 FUSE" [mm] "Fast Acting Smd 1206 non-Resettable Fuse Chip For Pcb Board-Design:Abbas Basereh"
  rect 1.85x1.85 smd: 1(-1.65,0) 2(1.65,0)
  silkscreen extent -2.41,-1.02 2.41,1.02, body extent -1.6,-0.8 1.6,0.8, height 1
651005136421 [mm] "Mini USB 2.0 Type B Vertical 5 Contacts"
  rrect50% 1.1x1.1 hole 0.6: 1(-1.6,-0.87)
  round 1.1 hole 0.6: 2(-0.8,1.03) 3(0,-0.87) 4(0.8,1.03) 5(1.6,-0.87)
  round 3 hole 2: Shell(-4.2,0.03) Shell(4.2,0.03)
  silkscreen extent -3.85,-1.95 3.85,1.95, body extent -5.1,-1.92 5.1,1.98, height 9.4
BAT-TH_MY-1220-01 [mm]
  oval 1.3x2.1 hole 0.6 slot 1.4 at 90 deg paste-2539.97 mask+0.05: 1(-6.4,0) 1(6.4,0)
  round 10 smd paste-100 mask+0.05: 2(0,0)
  silkscreen extent -6.62,-6.51 6.65,5.28
C0603 [mm] "CHIP Capacitor, 1.6X0.8mm, 0603 OPTIMIZED"
  rrect50% 0.8x0.8 smd paste-5 mask+0.075: 1(-0.7,0) 2(0.7,0)
  Top Layer pour cut-out: -0.5,0.4 0.5,0.4 0.5,-0.4 -0.5,-0.4
  silkscreen extent -1.4,-0.7 1.4,0.7, body extent -0.8,-0.4 0.8,0.4, height 0.9
C0603E [mm] "CHIP Capacitor, 1.6X0.8mm, EXPANDED PAD"
  rrect50% 1x1.2 smd mask+0.05: 1(-0.8,0) 2(0.8,0)
  silkscreen extent -1.43,-0.72 1.43,0.72, body extent -0.8,-0.4 0.8,0.4, height 0.9
C0805 [mm]
  rect 1.41x1.35 smd paste-100 mask+0.051: 1(-1,0) 2(1,0)
  silkscreen extent -1.96,-0.9 1.96,0.9
C1206E [mm] "CHIP Capacitor, 3.2X1.6mm, 1206, EXPANDED PAD"
  rrect20% 1.6x2.4 smd mask+0.075: 1(-1.4,0) 2(1.4,0)
  Top Layer pour cut-out: -0.8,1 -0.8,-1 0.8,-1 0.8,1
  silkscreen extent -2.4,-1.4 2.4,1.4, body extent -1.6,-0.8 1.6,0.8, height 1
C1210 [mm]
  rect 1.635x2.7 smd paste-100 mask+0.051: 1(-1.517,0) 2(1.517,0)
  silkscreen extent -2.56,-1.58 2.56,1.58
C_EL_D8L10 [mm] "Electrolytic Cap, Size E, Size F, 8.3X10"
  rect 4x2 smd: 1(-3.3,0) 2(3.3,0)
  Top Layer pour cut-out: 2.794,4.191 2.794,-4.191 -2.794,-4.191 -2.794,4.191
  silkscreen extent -4.4,-4.4 4.4,4.4, body extent -4.9,-4.25 4.8,4.25, height 10.3
C_TN_3216 [mm] "CAPACITOR, TAN A, 1206P, 3.2x1.6mm"
  rrect50% 1.8x1.2 smd mask+0.075: 1(-1.3,0) 2(1.3,0)
  Top Layer pour cut-out: -0.762,0.9 0.762,0.9 0.762,-0.9 -0.762,-0.9
  silkscreen extent -2.4,-0.9 1.7,0.9, body extent -1.7,-0.9 1.7,0.9, height 1.7
C_TN_7343 [mm] "CAPACITOR, TAN D, TAN E, TAN Y, TAN X, 7343P, 7.3X4.3mm"
  rrect50% 3x2.6 smd: 1(-3,0)
  rect 3x2.6 smd: 2(3,0)
  Top Layer pour cut-out: -2.032,2.2 -2.032,-2.2 2.032,-2.2 2.032,2.2
  silkscreen extent -4.35,-2.2 3.7,2.2, body extent -3.7,-2.22 3.7,2.22, height 4.2
DIOM5026X229N [mm]
  rect 2.2x1.55 smd: 1(-2.05,0) 2(2.05,0)
  silkscreen extent -2.83,-1.3 2.52,1.3, body extent -2.52,-1.3 2.52,1.3, height 2.29
HDR1X2 [mm] "Connector; Header; 2 Position"
  rect 1.5x1.5 hole 0.9: 1(0,0)
  round 1.5 hole 0.9: 2(2.54,0)
  silkscreen extent -1.27,-1.27 3.81,1.27
HDR1X8 [mm] "Connector; Header; 8 Position"
  rect 1.6x1.8 hole 0.9: 1(0,0)
  oval 1.6x1.8 hole 0.9: 2(2.54,0) 3(5.08,0) 4(7.62,0) 5(10.16,0) 6(12.7,0) 7(15.24,0) 8(17.78,0)
  silkscreen extent -1.27,-1.27 19.05,1.27
HDR2X10 [mm] "Connector; Header; 10x2 Position"
  rect 1.5x2 hole 1: 1(0,0)
  oval 1.5x2 hole 1: 2(0,2.54) 3(2.54,0) 4(2.54,2.54) 5(5.08,0) 6(5.08,2.54) 7(7.62,0) 8(7.62,2.54) 9(10.16,0) 10(10.16,2.54) 11(12.7,0) 12(12.7,2.54) 13(15.24,0) 14(15.24,2.54) 15(17.78,0) 16(17.78,2.54) 17(20.32,0) 18(20.32,2.54) 19(22.86,0) 20(22.86,2.54)
  silkscreen extent -1.27,-1.27 24.13,3.81
hr915310a [mm]
  rect 1.446x1.446 hole 0.89: 1(0,0)
  round 1.446 hole 0.89: 2(-1.27,-2.54) 3(-2.54,0) 4(-3.81,-2.54) 5(-5.08,0) 6(-6.35,-2.54) 7(-7.62,0) 8(-8.89,-2.54)
  round 1.53 hole 1.02: 9(1.88,10.55) 10(-0.61,10.55) 11(-8.28,10.55) 12(-10.77,10.55)
  round 2.445 hole 1.63: 13(3.455,2.46) 14(-12.345,2.46)
  round 1.625 hole 3.25 unplated: 15(1.27,6.35) 16(-10.16,6.35)
  silkscreen extent -12.44,-3.74 4.7,13.08, body extent -13.06,-3.74 4.17,13.08, height 17.25
IDC_2X5 [mm] "IDC, HEADER BOX 2X5, 10p, 2.54mm pitch"
  oval 1.5x2 hole 1 mask+0.1: 1(-5.08,-1.27) 2(-5.08,1.27) 3(-2.54,-1.27) 4(-2.54,1.27) 5(0,-1.27) 6(0,1.27) 7(2.54,-1.27) 8(2.54,1.27) 9(5.08,-1.27) 10(5.08,1.27)
  silkscreen extent -10.16,-5.2 10.16,4.6, body extent -10.18,-4.42 10.18,4.75, height 9.13
IND-SMD_L7.3-W6.6 [mm]
  rect 2.424x3.42 smd: 1(3.278,0) 2(-3.278,0)
  silkscreen extent -3.73,-3.38 3.73,3.38
IND-SMD_L12.3-W12.3 [mm]
  rect 4x6 smd paste+0 mask+0.051: 1(-5.25,0) 2(5.25,0)
  silkscreen extent -6.2,-6.2 6.2,6.2
IND_SPM6530T-2R2M-HZ [mm]
  rect 1.85x3.4 smd: 1(-2.775,0) 2(2.775,0)
  silkscreen extent -3.55,-3.25 3.55,3.25
INDC2520X120N [mm]
  rect 1.24x2.22 smd: 1(-1.09,0) 2(1.09,0)
  silkscreen extent -0.15,-1.1 0.15,1.1
"JST B2B-PH-K" [mm]
  oval 1.5x2.5 hole 0.7: 1(-1,0) 2(1,0)
  silkscreen extent -2.95,-2.8 2.95,1.7, body extent -2.95,-2.8 2.95,1.7, height 6
L0603E [mm] "INDUCTOR, FERRITE BEAD, 0603, 1.6X0.8mm, EXPANDED PAD"
  rrect50% 1x1.2 smd mask+0.05: 1(-0.8,0) 2(0.8,0)
  silkscreen extent -1.43,-0.72 1.43,0.72, body extent -0.8,-0.4 0.8,0.4, height 0.95
LED0603BLU [mm] "LED SMD 0603, BLUE"
  rect 0.8x0.8 smd paste-5 mask+0.075: 1(-0.8,0)
  rrect50% 0.8x0.8 smd paste-5 mask+0.075: 2(0.8,0)
  silkscreen extent -1.4,-0.6 1.4,0.6, body extent -0.8,-0.4 0.8,0.4, height 0.5
LED0603GRN [mm] "LED SMD 0603, GREEN"
  rect 0.8x0.8 smd paste-5 mask+0.075: 1(-0.8,0)
  rrect50% 0.8x0.8 smd paste-5 mask+0.075: 2(0.8,0)
  silkscreen extent -1.4,-0.6 1.4,0.6, body extent -0.8,-0.4 0.8,0.4, height 0.5
LED0603RED [mm] "LED SMD 0603, RED"
  rect 0.8x0.8 smd paste-5 mask+0.075: 1(-0.8,0)
  rrect50% 0.8x0.8 smd paste-5 mask+0.075: 2(0.8,0)
  silkscreen extent -1.4,-0.6 1.4,0.6, body extent -0.8,-0.4 0.8,0.4, height 0.5
LED0603YLW [mm] "LED SMD 0603, YELLOW"
  rect 0.8x0.8 smd paste-5 mask+0.075: 1(-0.8,0)
  rrect50% 0.8x0.8 smd paste-5 mask+0.075: 2(0.8,0)
  silkscreen extent -1.4,-0.6 1.4,0.6, body extent -0.8,-0.4 0.8,0.4, height 0.5
LGA-14_L3.0-W2.5-P0.50-TL [mm]
  rect 0.675x0.28 smd: 1(-1.262,0.75) 2(-1.262,0.25) 3(-1.262,-0.25) 4(-1.262,-0.75) 8(1.262,-0.75) 9(1.262,-0.25) 10(1.262,0.25) 11(1.262,0.75)
  rect 0.28x0.675 smd: 5(-0.5,-1.012) 6(0,-1.012) 7(0.5,-1.012) 12(0.5,1.012) 13(0,1.012) 14(-0.5,1.012)
  silkscreen extent -1.98,-1.33 1.58,1.33
MAX [mm]
  rect 1.8x0.7 smd paste-0.1: 1(0,0) 9(0,8.8) 10(-9.5,8.8) 18(-9.5,0)
  rect 1.8x0.8 smd paste-0.1: 2(0,1.1) 3(0,2.2) 4(0,3.3) 5(0,4.4) 6(0,5.5) 7(0,6.6) 8(0,7.7) 11(-9.5,7.7) 12(-9.5,6.6) 13(-9.5,5.5) 14(-9.5,4.4) 15(-9.5,3.3) 16(-9.5,2.2) 17(-9.5,1.1)
  silkscreen extent -9.58,-0.81 0.62,9.45, body extent -9.58,-0.65 0.12,9.45, height 2.47
PHOENIX_1803426 [mm] "PCB Header, 8A, 160 V, Pitch: 3.81mm, 2 Positions, MCV Serie"
  round 2.2 hole 1.2: 1(-1.905,0) 2(1.905,0)
  silkscreen extent -4.51,-3 4.51,4.25, body extent -4.5,-3 4.51,4.25, height 9.2
QFN50P400X400X100-25N-D [mm]
  rect 0.85x0.3 smd: 1(-1.95,1.25) 2(-1.95,0.75) 3(-1.95,0.25) 4(-1.95,-0.25) 5(-1.95,-0.75) 6(-1.95,-1.25) 13(1.95,-1.25) 14(1.95,-0.75) 15(1.95,-0.25) 16(1.95,0.25) 17(1.95,0.75) 18(1.95,1.25)
  rect 0.3x0.85 smd: 7(-1.25,-1.95) 8(-0.75,-1.95) 9(-0.25,-1.95) 10(0.25,-1.95) 11(0.75,-1.95) 12(1.25,-1.95) 19(1.25,1.95) 20(0.75,1.95) 21(0.25,1.95) 22(-0.25,1.95) 23(-0.75,1.95) 24(-1.25,1.95)
  rect 2.6x2.6 smd: 25(0,0)
  silkscreen extent -2.5,1.88 -2.25,2.12, body extent -2.05,-2.05 2.05,2.05, height 1
QFP50P2600X2600X160-176N [mm]
  rect 1.45x0.3 smd: 1(-12.725,10.75) 2(-12.725,10.25) 3(-12.725,9.75) 4(-12.725,9.25) 5(-12.725,8.75) 6(-12.725,8.25) 7(-12.725,7.75) 8(-12.725,7.25) 9(-12.725,6.75) 10(-12.725,6.25) 11(-12.725,5.75) 12(-12.725,5.25) 13(-12.725,4.75) 14(-12.725,4.25) 15(-12.725,3.75) 16(-12.725,3.25) 17(-12.725,2.75) 18(-12.725,2.25) 19(-12.725,1.75) 20(-12.725,1.25) 21(-12.725,0.75) 22(-12.725,0.25) 23(-12.725,-0.25) 24(-12.725,-0.75) 25(-12.725,-1.25) 26(-12.725,-1.75) 27(-12.725,-2.25) 28(-12.725,-2.75) 29(-12.725,-3.25) 30(-12.725,-3.75) 31(-12.725,-4.25) 32(-12.725,-4.75) 33(-12.725,-5.25) 34(-12.725,-5.75) 35(-12.725,-6.25) 36(-12.725,-6.75) 37(-12.725,-7.25) 38(-12.725,-7.75) 39(-12.725,-8.25) 40(-12.725,-8.75) 41(-12.725,-9.25) 42(-12.725,-9.75) 43(-12.725,-10.25) 44(-12.725,-10.75) 89(12.725,-10.75) 90(12.725,-10.25) 91(12.725,-9.75) 92(12.725,-9.25) 93(12.725,-8.75) 94(12.725,-8.25) 95(12.725,-7.75) 96(12.725,-7.25) 97(12.725,-6.75) 98(12.725,-6.25) 99(12.725,-5.75) 100(12.725,-5.25) 101(12.725,-4.75) 102(12.725,-4.25) 103(12.725,-3.75) 104(12.725,-3.25) 105(12.725,-2.75) 106(12.725,-2.25) 107(12.725,-1.75) 108(12.725,-1.25) 109(12.725,-0.75) 110(12.725,-0.25) 111(12.725,0.25) 112(12.725,0.75) 113(12.725,1.25) 114(12.725,1.75) 115(12.725,2.25) 116(12.725,2.75) 117(12.725,3.25) 118(12.725,3.75) 119(12.725,4.25) 120(12.725,4.75) 121(12.725,5.25) 122(12.725,5.75) 123(12.725,6.25) 124(12.725,6.75) 125(12.725,7.25) 126(12.725,7.75) 127(12.725,8.25) 128(12.725,8.75) 129(12.725,9.25) 130(12.725,9.75) 131(12.725,10.25) 132(12.725,10.75)
  rect 0.3x1.45 smd: 45(-10.75,-12.725) 46(-10.25,-12.725) 47(-9.75,-12.725) 48(-9.25,-12.725) 49(-8.75,-12.725) 50(-8.25,-12.725) 51(-7.75,-12.725) 52(-7.25,-12.725) 53(-6.75,-12.725) 54(-6.25,-12.725) 55(-5.75,-12.725) 56(-5.25,-12.725) 57(-4.75,-12.725) 58(-4.25,-12.725) 59(-3.75,-12.725) 60(-3.25,-12.725) 61(-2.75,-12.725) 62(-2.25,-12.725) 63(-1.75,-12.725) 64(-1.25,-12.725) 65(-0.75,-12.725) 66(-0.25,-12.725) 67(0.25,-12.725) 68(0.75,-12.725) 69(1.25,-12.725) 70(1.75,-12.725) 71(2.25,-12.725) 72(2.75,-12.725) 73(3.25,-12.725) 74(3.75,-12.725) 75(4.25,-12.725) 76(4.75,-12.725) 77(5.25,-12.725) 78(5.75,-12.725) 79(6.25,-12.725) 80(6.75,-12.725) 81(7.25,-12.725) 82(7.75,-12.725) 83(8.25,-12.725) 84(8.75,-12.725) 85(9.25,-12.725) 86(9.75,-12.725) 87(10.25,-12.725) 88(10.75,-12.725) 133(10.75,12.725) 134(10.25,12.725) 135(9.75,12.725) 136(9.25,12.725) 137(8.75,12.725) 138(8.25,12.725) 139(7.75,12.725) 140(7.25,12.725) 141(6.75,12.725) 142(6.25,12.725) 143(5.75,12.725) 144(5.25,12.725) 145(4.75,12.725) 146(4.25,12.725) 147(3.75,12.725) 148(3.25,12.725) 149(2.75,12.725) 150(2.25,12.725) 151(1.75,12.725) 152(1.25,12.725) 153(0.75,12.725) 154(0.25,12.725) 155(-0.25,12.725) 156(-0.75,12.725) 157(-1.25,12.725) 158(-1.75,12.725) 159(-2.25,12.725) 160(-2.75,12.725) 161(-3.25,12.725) 162(-3.75,12.725) 163(-4.25,12.725) 164(-4.75,12.725) 165(-5.25,12.725) 166(-5.75,12.725) 167(-6.25,12.725) 168(-6.75,12.725) 169(-7.25,12.725) 170(-7.75,12.725) 171(-8.25,12.725) 172(-8.75,12.725) 173(-9.25,12.725) 174(-9.75,12.725) 175(-10.25,12.725) 176(-10.75,12.725)
  silkscreen extent -13.32,-11.65 11.65,11.65, body extent -13,-13 13,13, height 1.6
R0603 [mm] "CHIP Resistor 1/10 WATT, 1.6x0.8mm, 0603, OPTIMIZED"
  rrect50% 0.8x0.8 smd paste-5 mask+0.075: 1(-0.7,0) 2(0.7,0)
  Top Layer pour cut-out: -0.5,0.4 0.5,0.4 0.5,-0.4 -0.5,-0.4
  silkscreen extent -1.4,-0.7 1.4,0.7, body extent -0.85,-0.4 0.85,0.4, height 0.56
R0603E [mm] "CHIP Resistor 1/10 WATT, 1.6x0.8mm, 0603, EXPANDED PAD"
  rrect50% 1x1.2 smd mask+0.05: 1(-0.8,0) 2(0.8,0)
  silkscreen extent -1.43,-0.72 1.43,0.72, body extent -0.85,-0.4 0.85,0.4, height 0.56
SMA [mm]
  round 2.5 hole 1.5: 1(0.027,0) 2(2.527,2.5) 3(-2.473,2.5) 4(2.527,-2.5) 5(-2.473,-2.5)
  silkscreen extent -3.12,-3.15 3.18,3.15, body extent -3.15,-3.18 3.2,3.18, height 9.6
SMB_L4.6-W3.6-LS5.3-RD [mm]
  rect 2.047x2.192 smd paste+0 mask+0.051: 1(-2.361,0) 2(2.361,0)
  silkscreen extent -3.12,-1.96 2.74,1.96
SO_8 [mm] "SOP-8, 5x3.9mm body 1.27mm pitch, SOT96-1, M08A, S8, SOIC8, VO8, MS-012AA(JEDEC), R-8, 8S2, VOG8"
  oval 2x0.6 smd: 1(-2.8,1.905) 2(-2.8,0.635) 3(-2.8,-0.635) 4(-2.8,-1.905) 5(2.8,-1.905) 6(2.8,-0.635) 7(2.8,0.635) 8(2.8,1.905)
  silkscreen extent -2.8,-2.7 2.1,2.8, body extent -3,-2.45 3,2.45, height 1.7
SO_16 [mm] "SOP, SOIC, 3.9mm width, 1.27mm pitch,"
  oval 2x0.6 smd: 1(-2.8,4.445) 2(-2.8,3.175) 3(-2.8,1.905) 4(-2.8,0.635) 5(-2.8,-0.635) 6(-2.8,-1.905) 7(-2.8,-3.175) 8(-2.8,-4.445) 9(2.8,-4.445) 10(2.8,-3.175) 11(2.8,-1.905) 12(2.8,-0.635) 13(2.8,0.635) 14(2.8,1.905) 15(2.8,3.175) 16(2.8,4.445)
  silkscreen extent -2.8,-5.2 2.1,5.4, body extent -3.1,-4.95 3.1,4.95, height 1.7
SOG65_20 [mm] "PW TSSOP (TI), MO-153-AC (JEDEC), 20Lead, pitch: 0.65mm, 6.5x4.4x1.2mm"
  oval 1.8x0.4 smd mask+0.075: 1(-2.9,2.925) 2(-2.9,2.275) 3(-2.9,1.625) 4(-2.9,0.975) 5(-2.9,0.325) 6(-2.9,-0.325) 7(-2.9,-0.975) 8(-2.9,-1.625) 9(-2.9,-2.275) 10(-2.9,-2.925) 11(2.9,-2.925) 12(2.9,-2.275) 13(2.9,-1.625) 14(2.9,-0.975) 15(2.9,-0.325) 16(2.9,0.325) 17(2.9,0.975) 18(2.9,1.625) 19(2.9,2.275) 20(2.9,2.925)
  silkscreen extent -3.1,-3.4 2.4,3.7, body extent -3.2,-3.25 3.2,3.25, height 1.2
SON65P200X200X80-7N [mm]
  rect 0.66x0.32 smd: 1(-1.025,0.65) 2(-1.025,0) 3(-1.025,-0.65) 4(1.025,-0.65) 5(1.025,0) 6(1.025,0.65)
  rect 0.9x1.6 smd paste-2: 7(0,0)
  silkscreen extent -2.01,-1.13 1,1.13, body extent -1,-1 1,1, height 0.8
SOT95P237X111-3N [mm]
  rect 1.23x0.6 smd: 1(-1.06,0.95) 2(-1.06,-0.95) 3(1.06,0)
  silkscreen extent -2.35,-1.45 0.65,1.45, body extent -1.2,-1.45 1.2,1.45, height 1.11
SOT95P280X100-6N [mm] "SOT23, 0.95mm pitch; 6 pin, 1.625mm W X 2.90mm L X 1.00mm H body, IPC Medium Density"
  rect 1.1x0.55 smd: 1(-1.35,0.95) 2(-1.35,0) 3(-1.35,-0.95) 4(1.35,-0.95) 5(1.35,0) 6(1.35,0.95)
  silkscreen extent -1.78,-1.45 0.48,1.87, body extent -1.4,-1.5 1.4,1.5, height 1
SOT95P280X145-5N [mm]
  rect 1.15x0.6 smd: 1(-1.3,0.95) 2(-1.3,0) 3(-1.3,-0.95) 4(1.3,-0.95) 5(1.3,0.95)
  silkscreen extent -1.88,-1.45 0.38,1.5, body extent -1.4,-1.45 1.4,1.45, height 1.45
SOT95P280X145-6N [mm]
  rect 1.15x0.6 smd: 1(-1.3,0.95) 2(-1.3,0) 3(-1.3,-0.95) 4(1.3,-0.95) 5(1.3,0) 6(1.3,0.95)
  silkscreen extent -1.88,-1.46 0.38,1.6, body extent -1.4,-1.46 1.4,1.46, height 1.45
SOT-23-3_L2.9-W1.3-P1.90-LS2.4-BR [mm]
  rect 1.25x0.7 smd: 1(1,-0.95) 2(1,0.95) 3(-1,0)
  silkscreen extent -0.73,-1.53 0.73,1.53
TANTALUM-A [mm]
  rect 2x2 smd: 1(0,0) 2(-2.7,0)
  silkscreen extent -3.9,-1.29 1.65,1.31, body extent -3.05,-0.8 0.35,0.8, height 1.65
TEST_POINT [mm]
  round 1.25 smd: 1(0,0)
TO-263-5 [mm]
  rect 1.05x3.25 smd: 1(0,0) 2(1.7,0) 3(3.4,0) 4(5.1,0) 5(6.8,0)
  rect 10.45x8.3 smd: 6(3.4,10.593)
  silkscreen extent -1.8,-0.13 8.6,6.04, body extent -1.65,-0.43 8.51,13.59, height 4.56
xh-3 [mm]
  rect 1.8x2.5 hole 1.1: 1(0,0)
  oval 1.8x2.5 hole 1.1: 2(2.54,0) 3(5.08,0.023)
  silkscreen extent -2.54,-3.43 7.62,2.92, body extent -2.41,-3.31 7.49,2.79, height 7
XTL_2_3215 [mm] "ABS07 3.2x1.5mm"
  rrect50% 1.6x1.6 smd mask+0.075: 1(-1.4,0) 2(1.4,0)
  Top Layer pour cut-out: -1.4,0.8 -1.4,-0.8 1.4,-0.8 1.4,0.8
  silkscreen extent -1.6,-0.9 1.6,0.9, body extent -1.61,-0.76 1.61,0.76, height 0.91
XTL_4_3225 [mm] "CRYSTAL OSCILATOR 3.2X2.5mm, ABM8, CDFN-4"
  rrect50% 1.2x1.4 smd: 1(-1,1.1) 2(-1,-1.1) 3(1,-1.1) 4(1,1.1)
  Top Layer pour cut-out: -1.6,1.8 -1.6,-1.8 1.6,-1.8 1.6,1.8
  silkscreen extent -1.6,-1.7 1.4,2.2, body extent -1.25,-1.6 1.25,1.6, height 0.61

## Part data
BT1: library part BATH_CR1220, "BATTERY HOLDER, CR1220", .=http://www.chila.ir, MANF_P#=-
C1 C3 C66 C67 C68 C69 C70 C71 C73 C75 C76 C77: library part Capacitor_ST, Revision="July-2002: Re-released for DXP Platform."
C2 C4 C5 C8 C9 C10 C11 C12 C64 C65: library part Cap, Published=8-Jun-2000, Publisher="Altium Limited", Revision="July-2002: Re-released for DXP Platform."
C6 C7 C13 C14 C15 C16 C17 C18 C19 C20 C21 C22 C23 C24 C25 C26 C27 C28 C62 C63: library part CAP
  C13 C14 C15 C16 C17 C18 C19 C20 C21 C22 C23 C24 C25 C26 C27 C28 C62 C63: Published=8-Jun-2000, Publisher="Altium Limited", Revision="July-2002: Re-released for DXP Platform."
C29 C72: library part CAP_SMD_TAN_10uF_6.3V, "CAP, SMD, TAN", MANF=VISHAY, MANF_P#=T55A106M6R3C0300, PARAM="20%, 300mOhm, -55~105oC", PARAM2=6.3V, PRICE=0.46$
C30 C43 C45 C46 C50: library part CAP_SMD_MLCC_22u25V, "CAP, MLCC, X5R 22uF 25V 20% 1206", DESC="CAP, MLCC, 22uF, 25V, X5R,  20%, 1206", MANF="Taiyo Yuden", MANF_P#=TMK316BBJ226ML-T, PARAM="X5R, 20%", PARAM2=25V, PRICE=0.572$
C31 C32 C39 C40 C41 C42 C44 C48 C49 C51 C53 C60 C61: library part "Capacitor SMD"
C33: library part 47uF, Manufacturer Part=GRM32ER71A476ME15L, catid=20, spicePre=C
C34: Manufacturer Part=GRM32ER71A476ME15L, catid=20, spicePre=C
C35 C36 C37 C47: library part CAP_SMD_EL_220uF_35v, "CAP, SMD, ELEC,", ASSEMBLY=ASSEMBLY, DESC=DESCRIPTION, DIST#=MOUSER, MANF=MANF, MANF_P#=MANF_PART#, PARAM=20%, PARAM2=35v
  C35 C36: PRICE="10= -$"
  C37 C47: PN=VZH221M1ETR-0810
C38: library part 224, JLCPCB Part Class="Extended Part", Manufacturer=FH, Manufacturer Part=0805F224M500NT, nameAlias=Capacitance, spicePre=C, spiceSymbolName=0805F224M500NT_C41051, Supplier=LCSC, Supplier Part=C41051
C52 C54: library part CAP_SMD_TAN, "CAP, SMD, TAN", MANF=VISHAY, MANF_P#=T55A106M6R3C0300, PARAM="20%, 300mOhm, -55~105oC", PARAM2=6.3V, PRICE=0.46$
C55: library part "CAP POL1", "SMD Capacitor Tantalum 1UF 10V 10% 1206", Manufacturer="Vishay or Panasonic", Foot print="1206 (3216 Metric)", LatestRevisionDate=17-Jul-2002, LatestRevisionNote="Re-released for DXP Platform.", PackageReference=RB7.6-15, Published=8-Jun-2000, Publisher="Altium Limited"
C56 C58 C59: library part Cap, "Ceramic Capacitor", Manufacturer="Vishay or Panasonic", Foot print="0805 (2012 Metric)", LatestRevisionDate=17-Jul-2002, LatestRevisionNote="Re-released for DXP Platform.", PackageReference=RAD-0.3, Published=8-Jun-2000, Publisher="Altium Limited"
C57: library part Cap, "Chip Monolithic Ceramic Capacitor; SMD", Current Footprint="0603 (1608 Metric)", Manufacturer="Murata Electronics North America", Manufacturer Part Number=GRM188R71C104KA01D, Supplier Part Number=NULL, Board Qty=100, ComponentLink1Description=Datasheet, ComponentLink1URL="D:\HNA\Datasheet Documents\c02e.pdf", Description1="Chip Monolithic Ceramic Capacitor; SMD", HelpURL="D:\HNA\Datasheet Documents\c02e.pdf", ITEM/NO=40, Mounting Type="Surface Mount", Package / Case="0603 (1608 Metric)", Packing List=CL10B104KB8NNNC, Part Number=47PF, PCB Name=Main_PCB, Pricing=NULL, Size / Dimension=NULL, Supplier=NULL
C74: library part "CAP SMD 0603  X5R 1µF 25V 10%", "0603  X5R 1µF", Rated Voltage=25V, Temperature Max=+125°C, Temperature Min=-55°C, Tolerance=10%, Order code Farnell=1288202RL, Technology=X5R
CN1: "WR-COM Mini USB 2.0 Type B Vertical 5 Contacts", Manufacturer="Wurth Elektronik", Operating Temperature Max=105°C, Operating Temperature Min=-40°C, Rated Current=1A, Working Voltage="30V (AC)", Application="Mini USB 2.0", Category="Input/Output Connectors", ComponentLink1Description="Website Link", ComponentLink1URL=https://www.we-online.com/redexpert/article/651005136421?ad, ComponentLink2Description="Datasheet Link", ComponentLink2URL=https://www.we-online.com/redexpert/spec/651005136421?ad, Gender=Receptacle, Interface Type="Type B", Manufacturer Part Number=651005136421, Match Code=WR-USB, Mount="Through Hole", Number of Pins=5, Number of Ports=1, Orientation=Vertical, Packaging=Tray
CON1: library part 19-46-2-TGG, "SMA Connector, PCB THT Jack, Straight", Manufacturer="Amphenol Connex", PartNumber=132134, ComponentLink1Description="Manufacturer Link", ComponentLink1URL=http://www.chinnan.com.tw/, DatasheetVersion="rev.A-0, Jul-2002", Foot print="Through Hole", PackageDescription="SMA Straight PCB Surface Mount Jack Receptacle", PackageReference=19-46-2, PackageVersion="rev.A-0, Jul-2002", Published=12-Dec-2006, Publisher="Altium Limited"
D1: "4-line ESD protection", Manuf_1=STM, Manuf_Part_1=ESDA5V3L, Distrib=ST, ECCN_US/EU=EAR99/NEC, Order=ESDA5V3L, Ordered by=STM, Provided=ST, Ref St=9179034
D2 D6: library part SS54C, "40V 5A Schottky Rectifier", JLCPCB Part Class="Extended Part", Manufacturer=LGE(鲁光), Manufacturer Part=SS54, Contributor=LCSC, spicePre=D, spiceSymbolName=SS54C, Supplier=LCSC, Supplier Part=C330398
D3: library part SMAJ24A, "TVS Diode (Uni-directional)", Manufacturer_Name=LITTELFUSE, Mouser Part Number=576-SMAJ24A, Arrow Part Number=SMAJ24A, Arrow Price/Stock=https://www.arrow.com/en/products/smaj24a/littelfuse?region=nac, Datasheet Link=https://componentsearchengine.com/Datasheets/2/SMAJ24A.pdf, Height=2.29mm, Manufacturer_Part_Number=SMAJ24A, Mouser Price/Stock=https://www.mouser.co.uk/ProductDetail/Littelfuse/SMAJ24A?qs=HR2RnyOI4E78ZevQKM2hdA%3D%3D
D4 D5: "Dual Bi-Directional TVS Diode 350W 3-Pin SOT-23", Package="SOT-23-3 ON Semiconductor", Check_prices=https://www.snapeda.com/parts/NUP2105LT1G/Onsemi/view-part/?ref=eda, MF="ON Semiconductor", MP=NUP2105LT1G, SnapEDA_Link=https://www.snapeda.com/parts/NUP2105LT1G/Onsemi/view-part/?ref=snap
F1: library part "Fuse SMD1206", "Fuse Type Fast Acting with 63V, 3A, 1206", Data=16-12-2016, Desc.="SMD Fuses 1206", Designer="Abbas Basereh"
FB1 FB2: library part Inductor, "Ferrite Bead", Published=8-Jun-2000, Publisher="Altium Limited", Revision="July-2002: Re-released for DXP Platform."
J1: library part IDC_2X5, "BOX HEADER 2*5 STRAIGHT"
J2: "HR915310A", Manufacturer_Name="Hanrun Electronics", Datasheet Link=https://www.lcsc.com/datasheet/lcsc_datasheet_2411121057_HANRUN-Zhongshan-HanRun-Elec-HR915310A_C2760326.pdf, Height=17.15mm, Manufacturer_Part_Number=hr915310a
L2 L4: library part 33uH, JLCPCB Part Class="Extended Part", Manufacturer="SHOU HAN(首韩)", Manufacturer Part=CYH125-33UH, Contributor=lcsc, nameAlias=Inductance, spicePre=L, spiceSymbolName=CYH125-33UH, Supplier=LCSC, Supplier Part=C2879698
L3: library part SPM6530T-2R2M-HZ, Package=None, Availability=Unavailable, MF="{'manufacturer': u'TDK Corporation'}", MP=SPM6530T-2R2M-HZ, PRICE=None
L5: "Inductor with Inductance: 10uH Tol. +/-20%, Package: 1008 (2520)", Package="2520 Murata", Check_prices=https://www.snapeda.com/parts/DFE252012F-100M=P2/Murata%20Electronics%20North%20America/view-part/1498782/?ref=eda, Digi-Key_Part_Number=490-13050-1-ND, DigiKey-Purchase-URL=https://snapeda.com/shop?store=DigiKey&id=1498782, MF="Murata Electronics", Mouser-Purchase-URL=https://snapeda.com/shop?store=Mouser&id=1498782, MP=DFE252012F-100M=P2, SnapEDA_Link=https://www.snapeda.com/parts/DFE252012F-100M=P2/Murata%20Electronics%20North%20America/view-part/1498782/?ref=snap
L6: library part IND1008_1UH_20%_WURTH_74479787210B, "Inductor", Case=1008, Manufacturer="WURTH ELEKTRONIK", Manufacturer Part Number=74479787210B, Power=1.95A, Resistance=0.06R, Tolerance=±20%, Author="CERN DEM JLC", Component Type=Standard, ComponentHeight=1mm, CreateDate=10/1/2014, HelpURL=\\cern.ch\dfs\Applications\Altium\Datasheets\IND_WURTH_WE-PMI_74479787210B.pdf, LatestRevisionDate=10/1/2014, Mounted=Yes, Part Description="Power Multilayer Inductor (WE-PMI Series)", Part Number=IND1008_1UH_20%_WURTH_74479787210B, Pin Count=2, Sense=No, SMD=Yes, Socket=No
L7: library part Inductor, "FIXED IND 10NH 300MA 0.10 OHM", Current Footprint="0603 (1608 Metric)", Manufacturer="Murata Electronics North America", Manufacturer Part Number=10nH/1%, Supplier Part Number=null, Board Qty=100, ITEM/NO=16, Package / Case="0603 (1608 Metric)", Part Number="10nH (LQW18AN10NG00)", PCB Name=Main_PCB, Pricing="1=0.18, 10=0.167, 25=0.1504, 50=0.1302, 100=0.1169, 250=0.10856, 500=0.1002, 750=0.09519, 1000=0.08684 (USD)", Size / Dimension=null, Supplier=null
LED1: library part LED_SMD_0603_BLU, "LED, SMD, 0603, BLUE", ASSEMBLY=ASSEMBLY, DESC=DESCRIPTION, MANF=MANF, MANF_P#=MANF_PART#, PARAM="30mA, 470nm, 120° Angle", PARAM2=2.2~3V, PRICE=PRICE
LED2: library part LED_SMD_0603_GRN, "LED, SMD, 0603, GREEN", ASSEMBLY=ASSEMBLY, DESC=DESCRIPTION, MANF=Kingbright, MANF_P#=APT1608SGC, PARAM=20mA, PARAM2=2.2V, PRICE="1: 0.14$, 100: 6.8$"
LED3: library part LED_SMD_0603_RED, "LED, SMD, 0603, RED", ASSEMBLY=ASSEMBLY, DESC=DESCRIPTION, MANF=MANF, MANF_P#=MANF_PART#, PARAM="30mA, 640nm", PARAM2=1.8~2.5V, PRICE=PRICE
LED4: library part LED_SMD_0603_YLW, "LED, SMD, 0603, YELLOW", ASSEMBLY=ASSEMBLY, DESC=DESCRIPTION, MANF=MANF, MANF_P#=MANF_PART#, PARAM2=2.2V, PRICE=PRICE
NTC1: library part "NTC power", "THERMISTOR 10K OHM +/-0.20 C", Device Code=143161
P1: library part "Header 3", "1x3P XH 2.54mm Male Straight Wire To Board Connector", LatestRevisionDate=17-Jul-2002, LatestRevisionNote="Re-released for DXP Platform.", Publisher="Altium Limited"
P2: library part "Header 10X2", "BOX HEADER 2*10 STRAIGHT", LatestRevisionDate=17-Jul-2002, LatestRevisionNote="Re-released for DXP Platform.", Publisher="Altium Limited"
P3 P6: library part PHOENIX_1803426, "Connector 2 Male", Manufacturer="PHOENIX CONTACT", Manufacturer Part Number="1803426 (MCV 1,5/2-G-3,81)", Author="CERN DEM JLC", Component Type=Standard, ComponentHeight=9.2mm, CreateDate=5/4/2010, HelpURL=\\cern.ch\dfs\Applications\Altium\Datasheets\PHOENIX_1803426.pdf, LatestRevisionDate=5/4/2010, Mounted=Yes, Part Description="8A 160 V, Pitch: 3.81mm, 2 Positions Header", Part Number=PHOENIX_1803426, Pin Count=2, PressFit=No, Sense=No, SMD=No, Socket=No, Status=None
P4 P7 P8 P9 P10 P11 P12 P13: library part PHOENIX_1803426, "JST PH 2P RIGHT", Manufacturer="PHOENIX CONTACT", Manufacturer Part Number="1803426 (MCV 1,5/2-G-3,81)", Author="CERN DEM JLC", Component Type=Standard, ComponentHeight=9.2mm, CreateDate=5/4/2010, HelpURL=\\cern.ch\dfs\Applications\Altium\Datasheets\PHOENIX_1803426.pdf, LatestRevisionDate=5/4/2010, Mounted=Yes, Part Description="8A 160 V, Pitch: 3.81mm, 2 Positions Header", Part Number=PHOENIX_1803426, Pin Count=2, PressFit=No, Sense=No, SMD=No, Socket=No, Status=None
P5: library part "Header 8", "Header, 8-Pin", LatestRevisionDate=17-Jul-2002, LatestRevisionNote="Re-released for DXP Platform.", Publisher="Altium Limited"
R1 R41: library part Res1, "Resistor: thick film; SMD", Current Footprint="0603 (1608 Metric)", Manufacturer=Yageo, Manufacturer Part Number=null, Supplier Part Number=NULL, Board Qty=100, ComponentLink1Description=Datasheet, ComponentLink1URL="D:\HNA\Datasheet Documents\PYu-RC_Group_51_RoHS_L_0.pdf", Description1="Resistor: thick film; SMD", HelpURL="D:\HNA\Datasheet Documents\PYu-RC_Group_51_RoHS_L_0.pdf", ITEM/NO=20, Mounting Type="Surface Mount", Package / Case="0603 (1608 Metric)", Packing List=0603F1002T5E, Part Number=10K, PCB Name=Main_PCB, Pricing=NULL, Size / Dimension=NULL, Supplier=NULL
R2: library part Res1, "Resistor: thick film; SMD", Current Footprint="0603 (1608 Metric)", Manufacturer=Yageo, Manufacturer Part Number=null, Part Number=10R, Board Qty=100, ComponentLink1Description=Datasheet, ComponentLink1URL="D:\HNA\Datasheet Documents\PYu-RC_Group_51_RoHS_L_0.pdf", Description1="Resistor: thick film; SMD", HelpURL="D:\HNA\Datasheet Documents\PYu-RC_Group_51_RoHS_L_0.pdf", ITEM/NO=131, Mounting Type="Surface Mount", Package / Case="0603 (1608 Metric)", Packing List=0603F1002T5E, PCB Name=Main_PCB, Pricing="1=0.1, 10=0.029, 50=0.0162, 100=0.0123, 250=0.00912, 500=0.00672, 1000=0.00448, 2500=0.00378 (USD)", Size / Dimension=null, Supplier=null, Supplier Part Number=null
R3 R5 R12 R35 R36: library part res1, Published=8-Jun-2000, Publisher="Altium Limited", Revision="July-2002: Re-released for DXP Platform."
R4 R8 R9 R10 R11 R16 R21 R25 R26 R27 R28 R31 R32 R33 R34 R37 R40 R57 R61 R62 R63 R64: library part Res1, Published=8-Jun-2000, Publisher="Altium Limited", Revision="July-2002: Re-released for DXP Platform."
R6 R7 R13 R14 R15 R17 R18 R19 R20 R22 R23 R24 R29 R30 R38 R39: library part "Resistor SMD"
R42 R43 R46 R47 R48 R53 R58 R59: library part Resistor_ST
R44 R45 R49 R50: library part Res_50_1%_0603, Manuf_1=YAGEO, Manuf_Part_1=RC0402FR-0750RL, Distrib=FARNELL, ECCN_US/EU=n/a
R51 R52 R55 R60: library part Res_33_1%_0402, Manuf_1=YAGEO, Manuf_Part_1=RC0402FR-0733RL, Distrib=FARNELL, ECCN_US/EU=n/a
R54: library part Res_12K1_1%_0603, Manuf_1=VISHAY, Manuf_Part_1="MCT 0603-50 1% P5 12K1", Distrib=FARNELL, ECCN_US/EU=n/a, Order=2325243
R56: library part Res_1K5_1%_0402, Manuf_1=YAGEO, Manuf_Part_1=RC0402FR-071K5L, Distrib=FARNELL, ECCN_US/EU=n/a, Order=RC0402FR-071K5L
U1: "Integrated Circuit", Manufacturer_Name=STMicroelectronics, Mouser Part Number=511-STM32H743IIT6, Arrow Part Number=STM32H743IIT6, Arrow Price/Stock=https://www.arrow.com/en/products/stm32h743iit6/stmicroelectronics?region=nac, Datasheet Link=https://componentsearchengine.com/Datasheets/1/STM32H743IIT6.pdf, Height=1.6mm, Manufacturer_Part_Number=STM32H743IIT6, Mouser Price/Stock=https://www.mouser.co.uk/ProductDetail/STMicroelectronics/STM32H743IIT6?qs=FNcb6ahWXRzE163cq8Rfjg%3D%3D
U2 U16: library part OPTC_TR16P_TLP281-4_SMD, "OPTOCOUPLER, TRANSISTOR, QUAD", Package=DIP-16SMD, MANF_P#=TLP281-4A, PRICE=4000t@PAYA
U3: "Integrated Circuit", Manufacturer_Name=ST, Datasheet Link=https://www.st.com/resource/en/datasheet/stmps2141.pdf, Height=1.45mm, Manufacturer_Part_Number=STMPS2151STR
U4 U5: library part SN65HVD230_SOP8, "CAN,  Transceivers, 3.3V (VDD)", MANF="Texas Instruments", MANF_P#="SN65HVD230D, SN65HVD230QD", PARAM=-40~85oC, PARAM2="3.3V (VDD)", PRICE=2.3$@MOUSER
U6: Manufacturer=XLSEMI, Contributor=GerryChen, Manufacturer Part=XL6009, sourceId=BD9FzR93l, spicePre=U, Supplier=LCSC, Supplier Part=C15831
U7: "Adjustable- and fixed-output, 1-A, 16-V, positive-voltage low-dropout (LDO) linear regulator", Package="WSON-6 Texas Instruments", Check_prices=https://www.snapeda.com/parts/TLV76733DRVR/Texas+Instruments/view-part/?ref=eda, MF="Texas Instruments", MP=TLV76733DRVR, SnapEDA_Link=https://www.snapeda.com/parts/TLV76733DRVR/Texas+Instruments/view-part/?ref=snap
U8 U9: "4.5V to 28V Input, 2-A Output, EMI Friendly / Synchronous Step Down Converter", Case=SOT23-6, Manufacturer="TEXAS INSTRUMENTS", Author="CERN DEM HF", Bonding=No, Component Type=Standard, ComponentHeight=1.1mm, CreateDate=6/10/2022, Device=TPS54202DDC, HelpURL=\\cern.ch\dfs\Applications\Altium\Datasheets\TPS54202.pdf, LatestRevisionDate=6/10/2022, Manufacturer Part Number=TPS54202DDC, Mounted=Yes, PackageDescription="SOT23, 0.95mm Pitch; 6 Pin, 1.625mm W X 2.90mm L X 1.00mm H body, IPC Medium Density", Part Description="4.5V to 28V Input, 2A Output, EMI Friendly Synchronous Step Down Converter", Part Number=TPS54202DDC, Pin Count=5, PressFit=No, Sense=No, SMD=Yes, Socket=No
U10: library part TXS0108_SSOP20, "Level Translator, Octal", MANF="Texas Instruments", MANF_P#=TXS0108EPWR
U11: library part MAX, "GPS chip module MAX-7Q", Current Footprint=SMD, Manufacturer=NULL, Manufacturer Part Number-1=TF1097U7M3, Manufacturer-1="ShenZhen Tifull Technology Ltd.", Part Number=EPP0910, Supplier Part Number="Seeed Studio - 317050009", Board Qty=100, HelpURL="D:\HNA\Datasheet Documents\u-blox-MAX-7_DataSheet_(GPS.G7-HW-12012)_2.pdf", ITEM/NO=117, Manufacturer Part Number=NULL, Package / Case=SMD, Part Number-1=MAX-7Q, Part Number-2=TF1097U7M3, PCB Name=Main_PCB, Pricing="1=12.00000, 100=12.00000 (USD)", Size / Dimension=NULL, Supplier=Octopart
U12: library part AP2120N-3.3TRG1, Dropout Voltage=500mV@(150mA), JLCPCB Part Class="Extended Part", LCSC Part Name="输入6V 输出3.3V 150mA", Manufacturer=DIODES(美台), MAX Output Current=150mA, Maximum Input Voltage=6V, Operating Temperature=-40℃~+85℃, Output Voltage=3.3V, Power Supply Rejection Ratio (PSRR)=65dB@(1kHz), standby current=50uA, Add into BOM=yes, Convert to PCB=yes, Datasheet=https://atta.szlcsc.com/upload/public/pdf/source/20180307/C156330_15204110207831407988.pdf, Device=AP2120N-3.3TRG1, Manufacturer Part=AP2120N-3.3TRG1, Number of Outputs=1, Output Polarity="Positive electrode", Supplier=LCSC, Supplier Footprint=SOT-23, Supplier Part=C156330, Symbol=AP2120N-3.3TRG1
U13: "SPARKFUN 6 DEGREES OF FREEDOM BR", Package=None, Availability="In Stock", Check_prices=https://www.snapeda.com/parts/LSM6DSO/STMicroelectronics/view-part/?ref=eda, MF=STMicroelectronics, MP=LSM6DSO, PRICE=None, Purchase-URL=https://pricing.snapeda.com/search/part/LSM6DSO/?ref=eda, SnapEDA_Link=https://www.snapeda.com/parts/LSM6DSO/STMicroelectronics/view-part/?ref=snap
U14: "Integrated Circuit", Manufacturer_Name=STMicroelectronics, Mouser Part Number=511-USBLC6-4SC6, Arrow Part Number=USBLC6-4SC6, Arrow Price/Stock=https://www.arrow.com/en/products/usblc6-4sc6/stmicroelectronics?region=europe, Datasheet Link=http://www.st.com/st-web-ui/static/active/en/resource/technical/document/datasheet/CD00047494.pdf, Height=1.45mm, Manufacturer_Part_Number=USBLC6-4SC6, Mouser Price/Stock=https://www.mouser.co.uk/ProductDetail/STMicroelectronics/USBLC6-4SC6?qs=k9dH%2Fx4GHJCNdehb8zInZg%3D%3D
U15: "LAN8742A-CZ-TR - Small Footprint RMII 10/100 Ethernet, Transceiver with HP Auto-MDIX and flexPWR Technology SQFN-24", Manuf_1=MICROCHIP, Distrib=MICROCHIP, Manuf_Part_1=LAN8742A-CZ-TR, Order=LAN8742A-CZ-TR
X1: library part XTL_2_32.768_3215A, "Crystal, 32.768KHz, 3pF, 20PPM", MANF=ABRACON, MANF_P#=ABS07W-32.768kHz-D-2-T, PARAM=-40~85oC, PARAM2="3pF, 20PPM", PRICE=1$
X2 X3: library part XTL_4_25MHz_3225, "CRYSTAL 25.00 MHZ 18pF, 10PPM", ASSEMBLY=ASSEMBLY, DESC=DESCRIPTION, DIST#=MOUSER, MANF=EPSON, MANF_P#="TSX-3225 25.0000MF10P-C3", PARAM=10PPM, PARAM2=PARAM, PRICE=0.5$
+1.8V +3.3V GND TP3 TP6 TP7 TP8 TP9 VDD_RADAR VDD_RK3588: Board Qty=100, PCB Name=Main_PCB

## Free pads (board coordinates)
  round 3.5 hole 3.5: 1(-2.098,-12.772) 1(0,0) 1(0,20) 1(41,0) 1(41,20) 2(51.142,-12.772) 3(-2.098,-61.852) 4(51.142,-61.852)

## Via types
v1: diameter 0.8, hole 0.4, Top Layer to Bottom Layer, tented both sides, 480 vias
v2: diameter 0.8, hole 0.4, Top Layer to Bottom Layer, 288 vias
v3: diameter 1, hole 0.5, Top Layer to Bottom Layer, tented both sides, 14 vias

## Nets (pads, with @x,y where several pads share a name; then routed paths per layer and width w, separated by ;. In a path a pad name is that pad's centre, name@x,y a point inside that pad or via, vN(x,y) a via of type N, cw(c..) or ccw(c..) an arc to the next point about the centre after c; other vN are vias at no path point)
1V8: +1.8V.1 C58.1 C60.2 U10.2 U12.2 | length 15.2
  Top Layer w0.4: C58.1@-25.061,-0.13 -25.616,0.426 -25.616,1.572 -24.85,2.338 U10.2@-23.362,2.338 ; U12.2@-24.845,-1.974 -24.814,-2.004 C60.2@-23.135,-2.004
  Top Layer w0.5: +1.8V.1@-30.874,-3.889 -30.676,-3.889 -30.117,-3.33 v1(-30.036,-3.33) ; v1(-25.947,-1.831) -25.88,-1.831 -25.72,-1.991 -24.863,-1.991 U12.2@-24.845,-1.974 -24.961,-1.974 -25.061,-1.874 C58.1@-25.061,-0.13 ; C60.2@-23.149,-2.019 -23.135,-2.004 C60.2@-23.127,-1.997
  Bottom Layer w0.5: v1(-30.036,-3.33) -27.445,-3.33 v1(-25.947,-1.831)
3V3@0.5A: P2.11
5V@1A: P2.9
+5V: C42.2 C45.2 C46.2 C48.2 L5.2 R7.1 TP3.1 U3.5 U7.4 U7.6 | length 37.8
  Top Layer w0.3: C42.2@-64.999,26.845 -64.986,26.845 -63.843,26.845 -63.488,26.49 U7.4@-63.488,25.143